# EAGLE board A10S-OLinuXino-MICRO_Rev_A (EAGLE 4.16), part 1 of 2
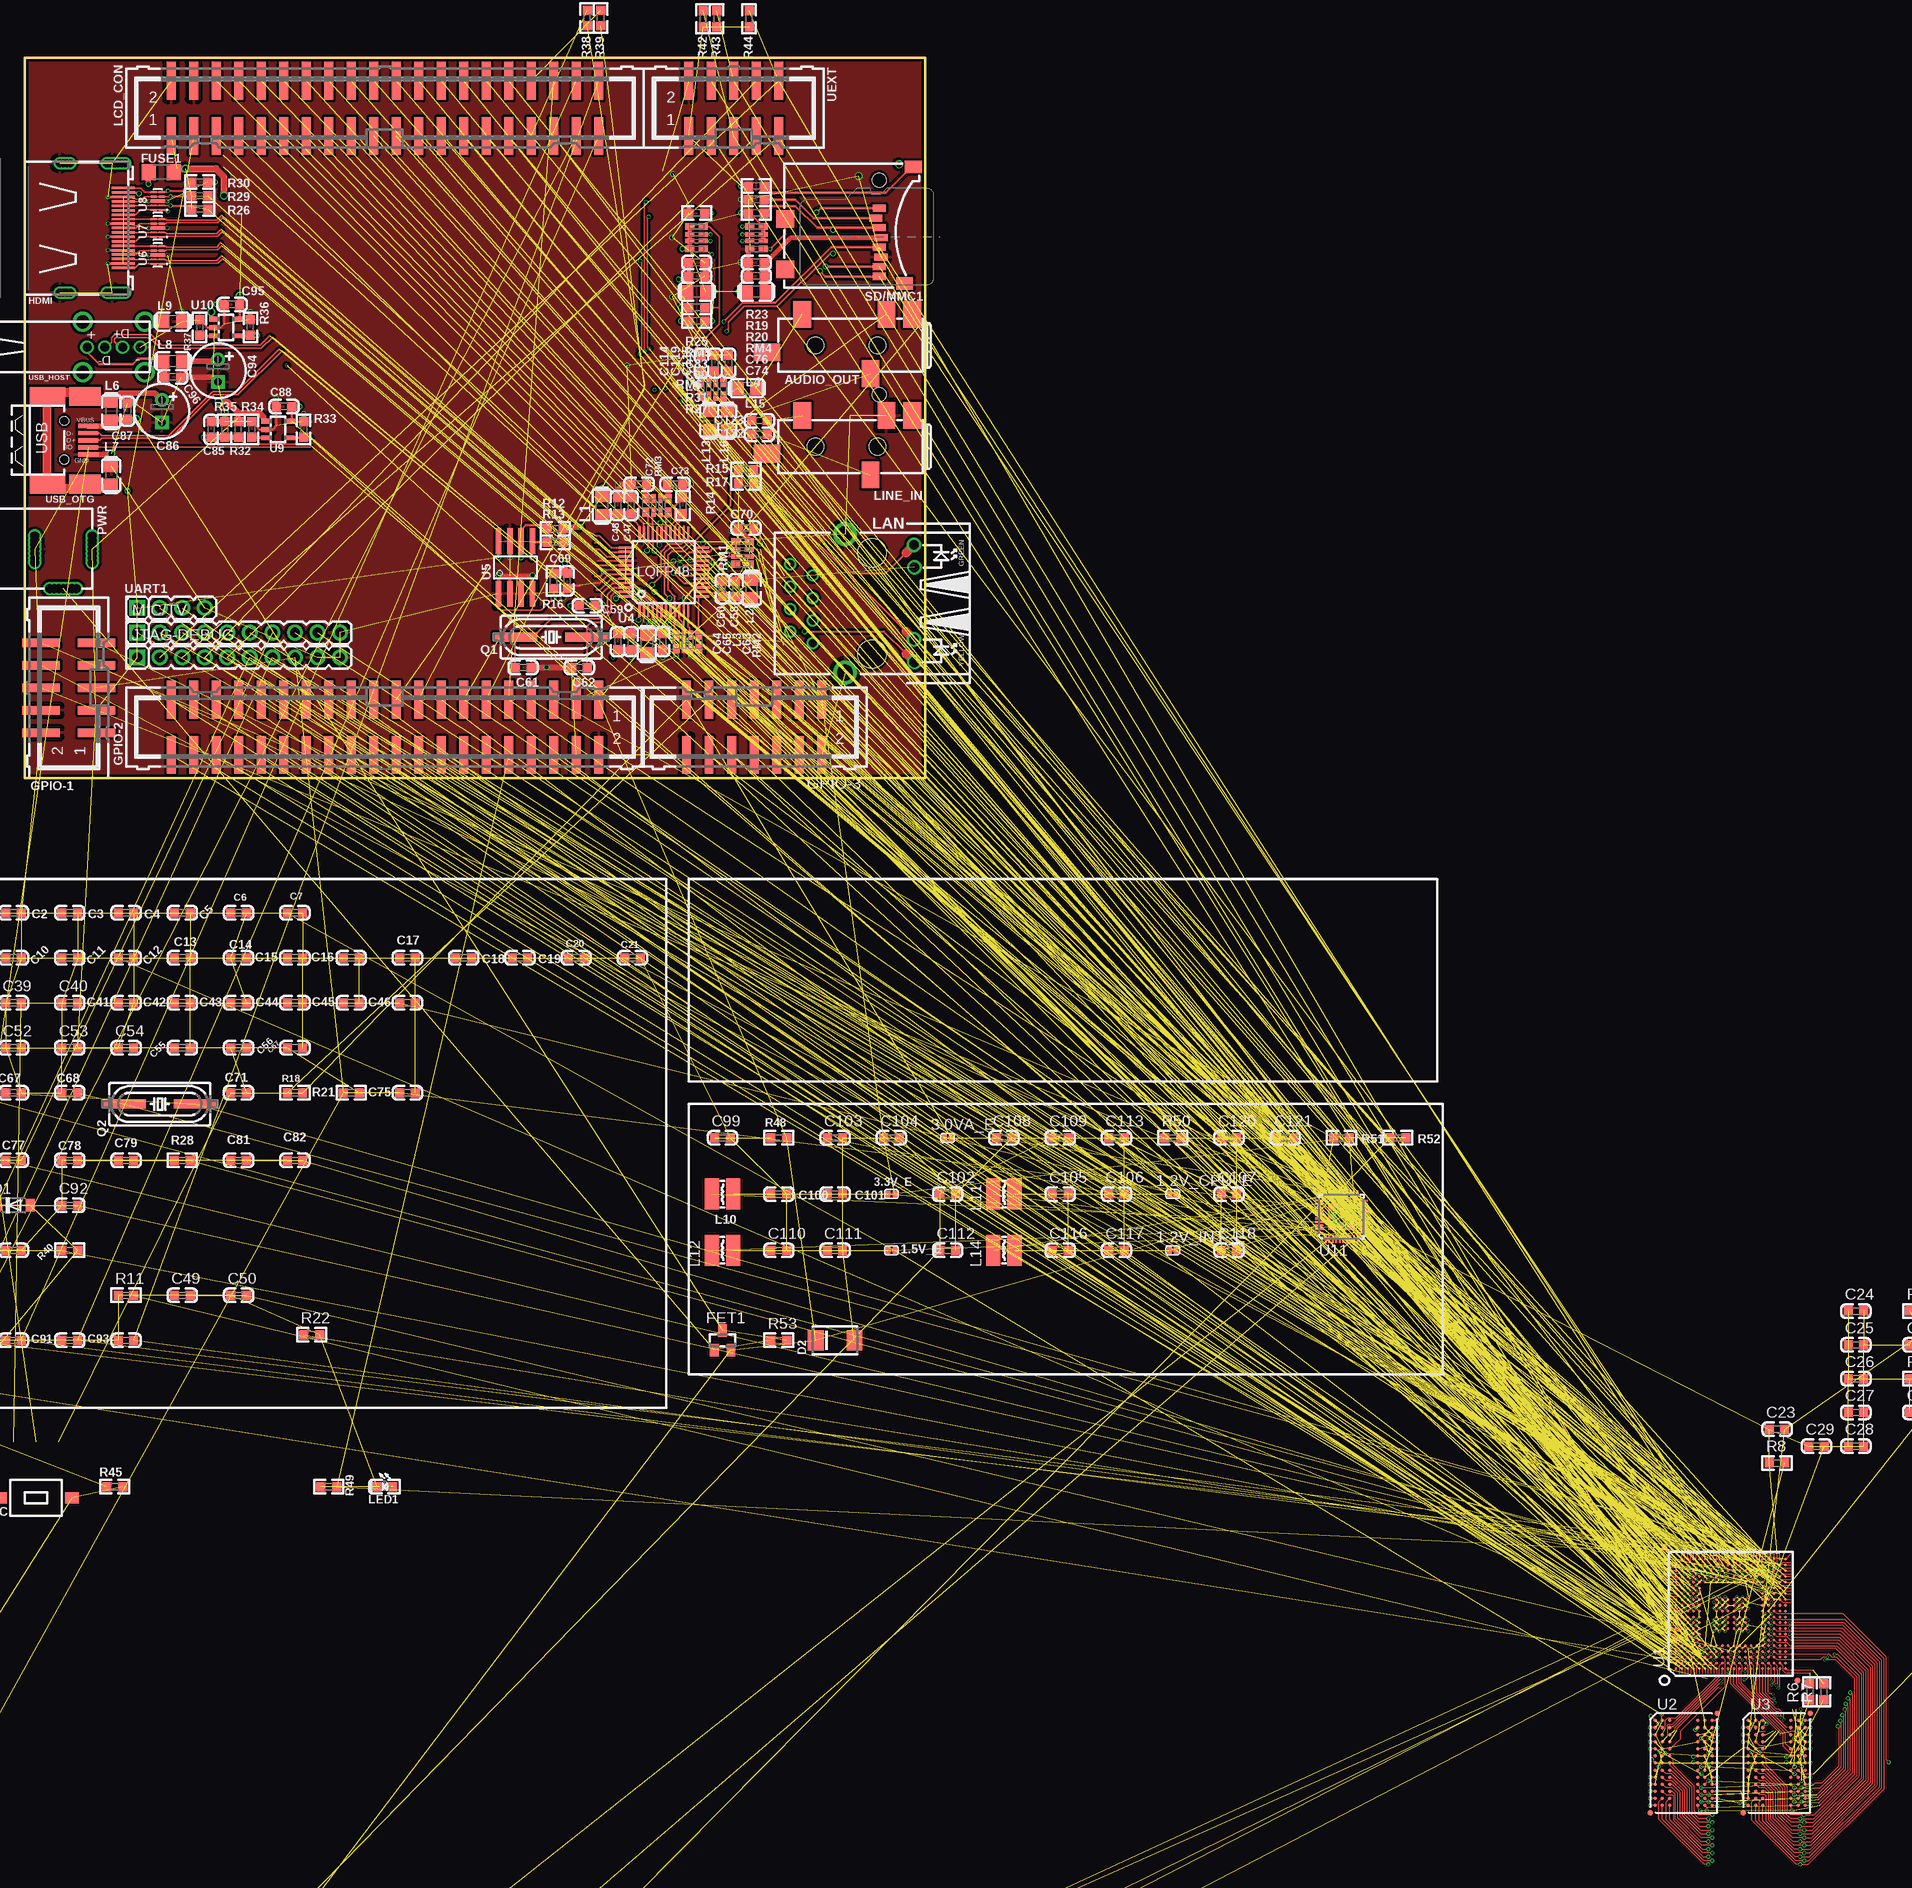
[diagram p0: board, top side]
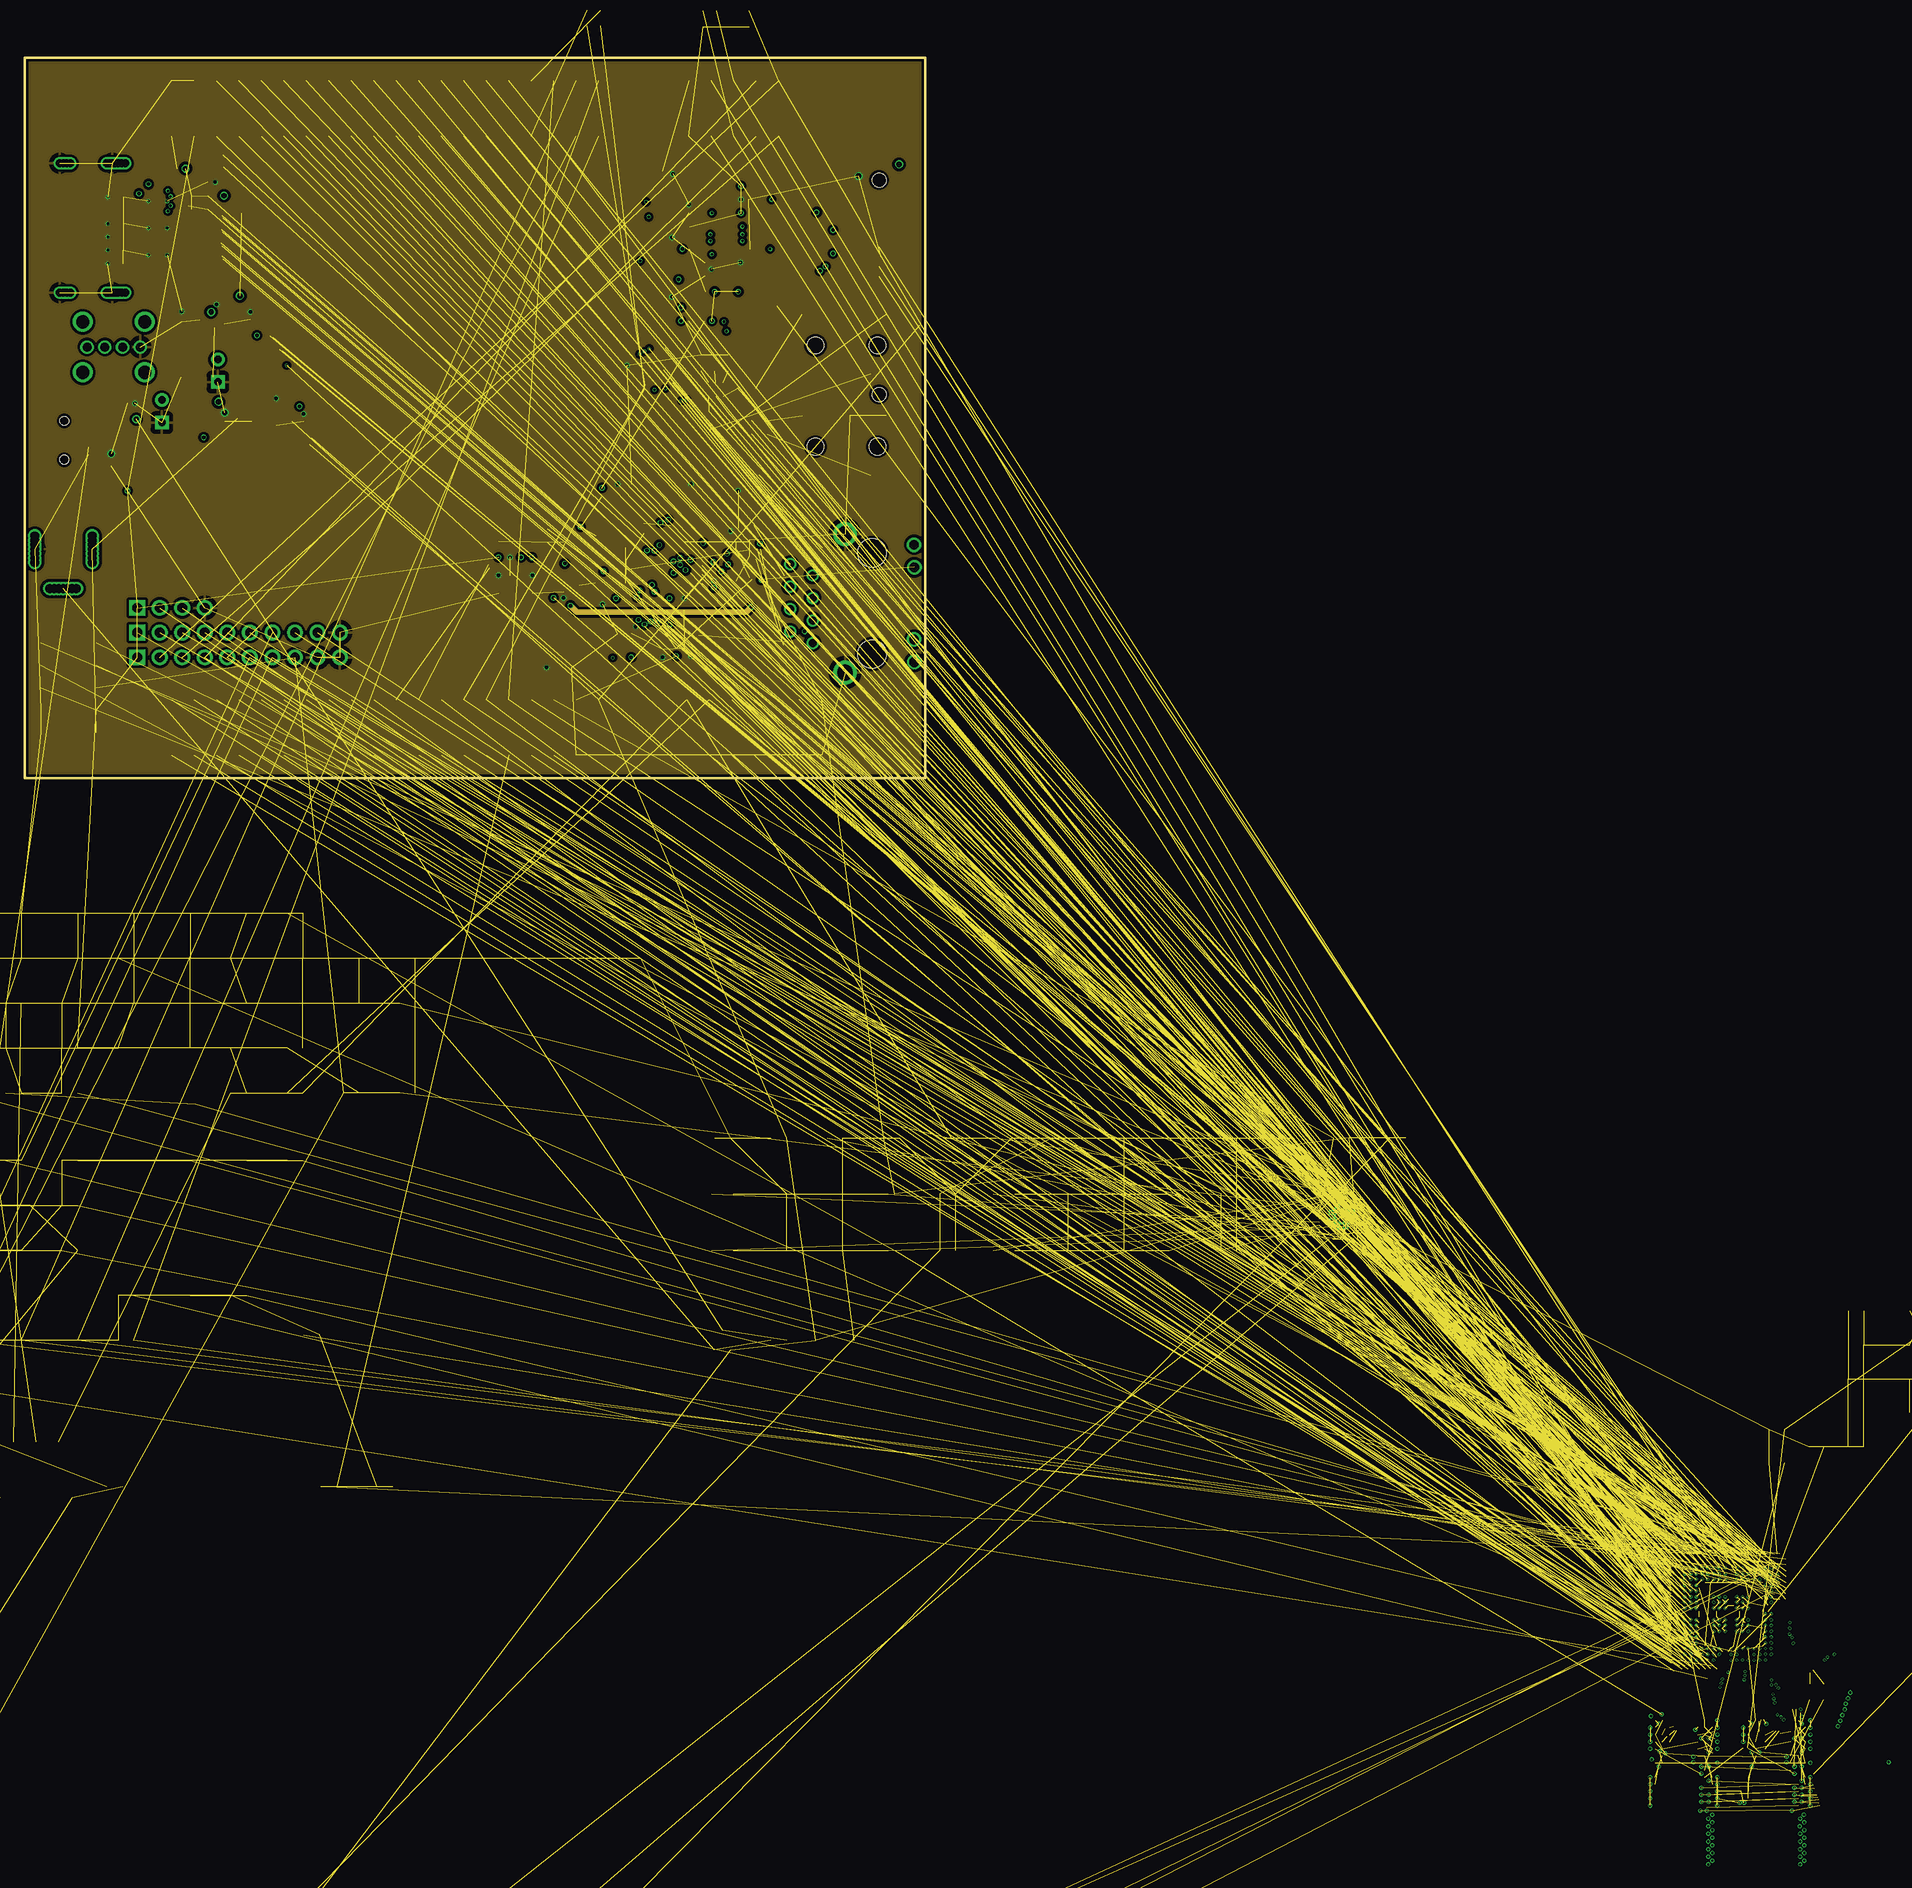
[diagram p1: board, inner layer Route2]
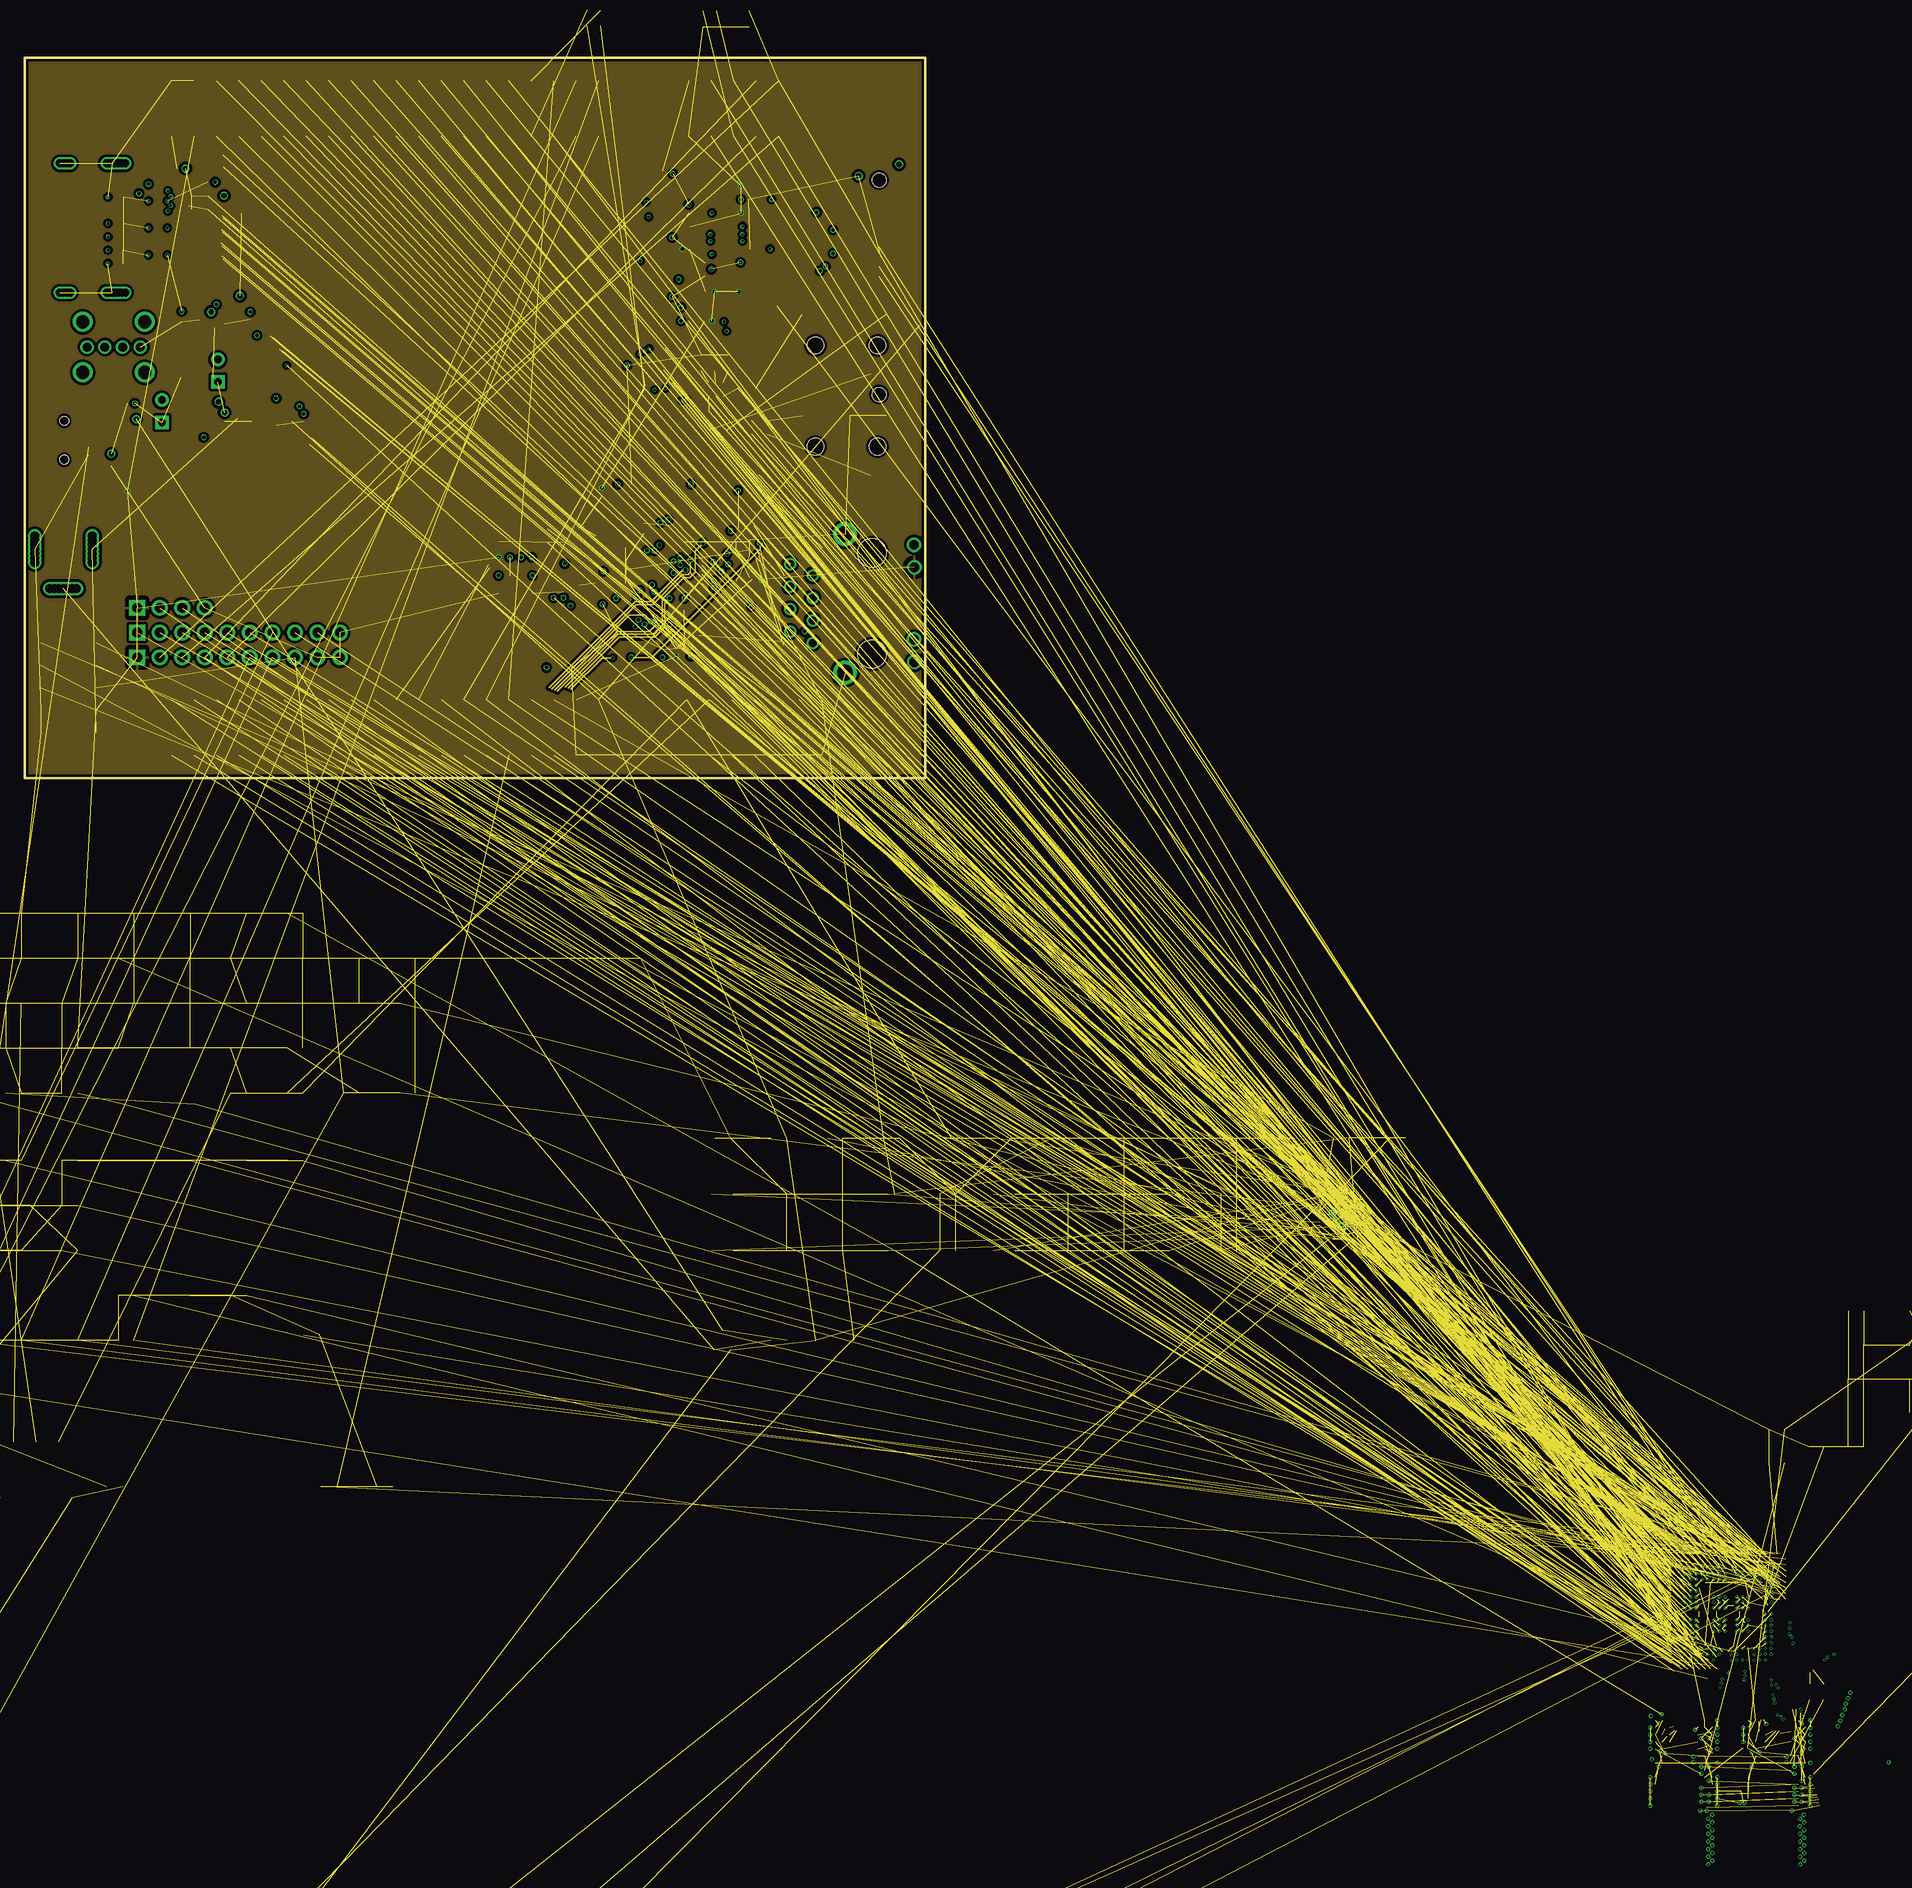
[diagram p2: board, inner layer Route15]
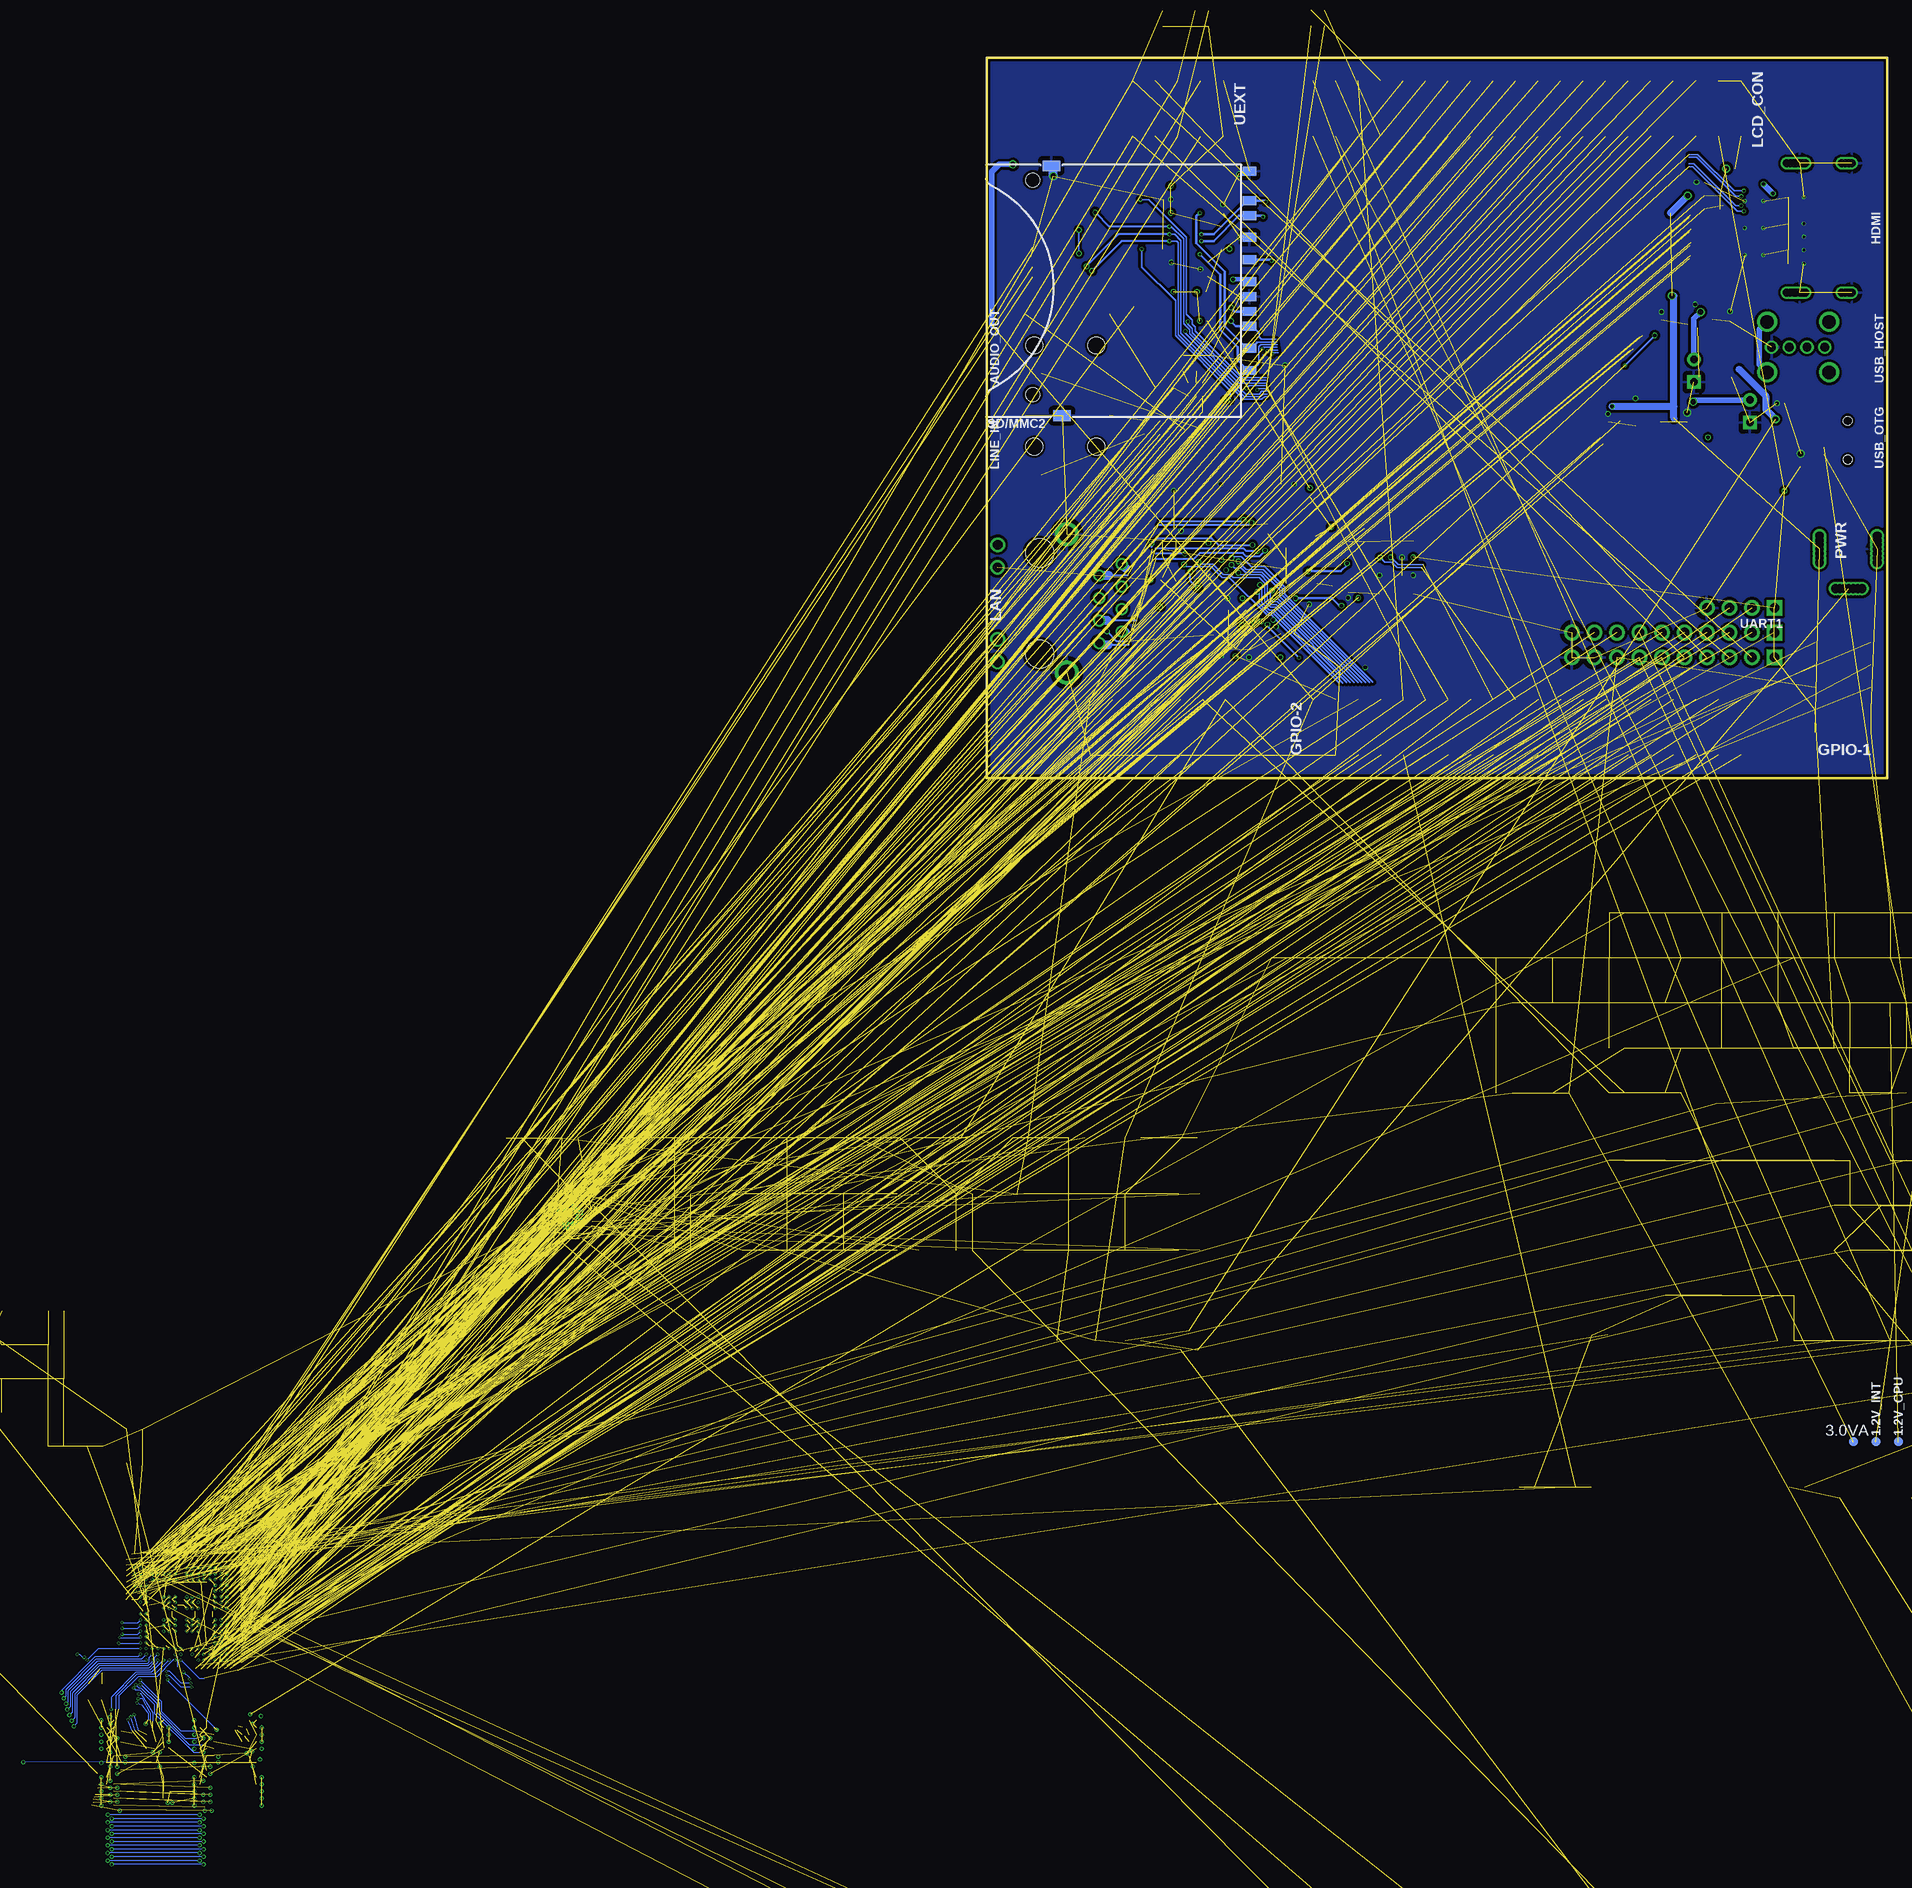
[diagram p3: board, bottom side, seen from below]

Size 101.6 x 81.28 mm. Coordinates in mm from the lower left corner, seen from the top.
Outline: 0,0 101.6,0 101.6,81.28 0,81.28 0,0
Copper layers (1*2*15*16): Top 0.018mm / dielectric 0.12mm / Route2 0.035mm / dielectric 1.2mm / Route15 0.035mm / dielectric 0.12mm / Bottom 0.018mm
Design rules "default": minimum track width 4mil, minimum drill 0.2mm, track to track 5mil, track to pad 5mil, pad to pad 5mil, via to via 5mil, smd to smd 1mil, copper to edge 10mil, drill to drill 8mil, minimum pad ring 6mil, minimum via ring 2.5mil, stop-mask expansion 4mil, vias tented up to drill 25mil, thermal gap 20mil
Net classes: 1 PWR: width 0.127 mm, drill 0.076 mm, clearance 0.254 mm

## Footprints (pad centres in the part's own frame; a part is rotated, then mirrored left to right if it is on the bottom)
TESTPAD_40-ROUND = smd 1.016 x 1.016: 1 0,0
SJ_1_SMALLER_CLOSE = smd 0.508 x 0.762: 1 -0.381,0; 2 0.381,0
SJ_2_SMALL_12_TIED = smd 0.762 x 1.016: 1 -1.143,0; 2 0,0; 3 1.143,0
PJ-W47S-05D2-LF_5PIN_V2 = smd 2 x 3: 1 2.1,-0.5; 2 14.5,-0.5; 3 6.8,6.2; 5 5,-0.5 | smd 3 x 2: 4 18.5,3.8 | hole 1.9: 6,3; 13,3
SW-TAKT_6X3.5_SMD = smd 1.27 x 1.524: P$1 0,4.064; P$2 0,-4.064
C0603_DWS = smd 1.016 x 1.016: 1 -0.889,0; 2 0.889,0
E2,5-6,3 = drill 0.864 pad 1.524 round: + -1.27,0 | drill 0.864 pad 1.524 square: - 1.27,0
SOD-123 = smd 1 x 1.4: A 1.9,0; C -1.9,0
DO214AA = smd 1.778 x 2.286: A 2.177,0; C -2.177,0
SOT23 = smd 1 x 1.4: 1 -0.95,-1.1; 2 0.95,-1.1; 3 0,1.1
1206 = smd 1.6 x 1.8: 1 -1.4,0; 2 1.4,0
ML10_S = smd 1 x 4.25: 1 -5.08,-3.125; 2 -5.08,3.125; 3 -2.54,-3.125; 4 -2.54,3.125; 5 0,-3.125; 6 0,3.125; 7 2.54,-3.125; 8 2.54,3.125; 9 5.08,-3.125; 10 5.08,3.125
ML40-MALE(GBH-254-SMT-40) = smd 1 x 4.25: 1 -24.13,-3.125; 2 -24.13,3.125; 3 -21.59,-3.125; 4 -21.59,3.125; 5 -19.05,-3.125; 6 -19.05,3.125; 7 -16.51,-3.125; 8 -16.51,3.125; 9 -13.97,-3.125; 10 -13.97,3.125; 11 -11.43,-3.125; 12 -11.43,3.125; 13 -8.89,-3.125; 14 -8.89,3.125; 15 -6.35,-3.125; 16 -6.35,3.125; 17 -3.81,-3.125; 18 -3.81,3.125; 19 -1.27,-3.125; 20 -1.27,3.125; 21 1.27,-3.125; 22 1.27,3.125; 23 3.81,-3.125; 24 3.81,3.125; 25 6.35,-3.125; 26 6.35,3.125; 27 8.89,-3.125; 28 8.89,3.125; 29 11.43,-3.125; 30 11.43,3.125; 31 13.97,-3.125; 32 13.97,3.125; 33 16.51,-3.125; 34 16.51,3.125; 35 19.05,-3.125; 36 19.05,3.125; 37 21.59,-3.125; 38 21.59,3.125; 39 24.13,-3.125; 40 24.13,3.125
ML14_S = smd 1 x 4.25: 1 -7.62,-3.125; 2 -7.62,3.125; 3 -5.08,-3.125; 4 -5.08,3.125; 5 -2.54,-3.125; 6 -2.54,3.125; 7 0,-3.125; 8 0,3.125; 9 2.54,-3.125; 10 2.54,3.125; 11 5.08,-3.125; 12 5.08,3.125; 13 7.62,-3.125; 14 7.62,3.125
HDMI-SWM-19 = smd 2.6 x 0.28: 1 1.3,4.5; 2 1.3,4; 3 1.3,3.5; 4 1.3,3; 5 1.3,2.5; 6 1.3,2; 7 1.3,1.5; 8 1.3,1; 9 1.3,0.5; 10 1.3,0; 11 1.3,-0.5; 12 1.3,-1; 13 1.3,-1.5; 14 1.3,-2; 15 1.3,-2.5; 16 1.3,-3; 17 1.3,-3.5; 18 1.3,-4; 19 1.3,-4.5 | drill 0.9 round: P$5 1.5,7.3; P$7 7.7,7.3; P$9 7.7,-7.3; P$11 1.5,-7.3; P$13 1.9,7.3; P$14 3.2,7.3; P$15 8.1,7.3; P$18 8.1,-7.3; P$19 3.2,-7.3; P$20 1.9,-7.3; P$21 2.2,7.3; P$22 2.9,7.3; P$23 2.9,-7.3; P$24 2.2,-7.3; P$25 1.1,7.3; P$26 1.1,-7.3; P$27 7.3,-7.3; P$28 7.3,7.3; SH1 2.55,7.3; SH2 8.45,7.3; SH3 8.45,-7.3; SH4 2.55,-7.3
SJ_1_SMALLER = smd 0.508 x 0.762: 1 -0.381,0; 2 0.381,0
HN1X10 = drill 1.1 pad 1.778 square: 1 -11.43,0 | drill 1.1 pad 1.778 round: 2 -8.89,0; 3 -6.35,0; 4 -3.81,0; 5 -1.27,0; 6 1.27,0; 7 3.81,0; 8 6.35,0; 9 8.89,0; 10 11.43,0
L0805_5MIL_DWS = smd 1.27 x 1.524: 1 -1.016,0; 2 1.016,0
CD32 = smd 3.5 x 1.6: 1 0,1.2; 2 0,-1.2
RJLBC-060TC1 = drill 0.9 round: 1 -4.455,6.7; 2 -3.185,9.24; 3 -1.915,6.7; 4 -0.645,9.24; 5 0.625,6.7; 6 1.895,9.24; 7 3.165,6.7; 8 4.435,9.24 | drill 1.1 round: AG 4.07,-4.773; AY -6.61,-4.773; KG 6.61,-4.748; KY -4.07,-4.748 | drill 1.8 round: GND1 -7.8,3.05; GND2 7.8,3.05 | hole 3.2: -5.715,0; 5.715,0
LED-0603 = smd 1.016 x 1.016: A 0.889,0; C -0.889,0
PWR_JACK_UNI_MILLING = drill 1 round: + 0,4.75; +1 0,5.25; +2 0,5.75; +3 0,6.25; +4 0,4.25; +5 0,3.75; +6 0,3.25; - -6.5,4.75; -1 -6.5,5.25; -2 -6.5,5.75; -3 -6.5,4.25; -4 -6.5,3.75; -5 -6.5,6.25; -6 -6.5,3.25; -- -3.3,0.3; --1 -3.8,0.3; --2 -4.3,0.3; --3 -4.8,0.3; --4 -2.8,0.3; --5 -2.3,0.3; --6 -1.8,0.3
HC49/SMD2_THIN = smd 5 x 1: 1 -4.064,0; 2 4.064,0
R0603_5MIL_DWS = smd 1.016 x 1.016: 1 -0.889,0; 2 0.889,0
0603_0R = smd 1.016 x 1.016: 1 -0.889,0; 2 0.889,0
R_MATRIX_4 = smd 1.016 x 0.762: 1.1 -0.762,1.27; 1.2 0.762,1.27; 4.1 -0.762,-1.27; 4.2 0.762,-1.27 | smd 1.016 x 0.508: 2.1 -0.762,0.381; 2.2 0.762,0.381; 3.1 -0.762,-0.381; 3.2 0.762,-0.381
TFR-MEM-CON = smd 0.8 x 1.5: 1 -3.2,10.7; 2 -2.1,10.3; 3 -1,10.7; 4 0.1,10.9; 5 1.2,10.7; 6 2.3,10.9; 7 3.4,10.7; 8 4.5,10.7 | smd 2 x 2: 9 3.7,0.1; 10 -2,0.1 | smd 1.4 x 1.9: 11 5.3,13.55; 12 -7.85,14.55
SD_CARD = smd 1 x 1.5: 1 6.88,15.3; 2 4.38,15.3; 3 1.08,15.3; 4 -0.63,15.3; 5 -3.13,15.3; 6 -5.63,15.3; 7 -8.06,15.3; 8 -9.76,15.3; 9 9.38,15.3; CD 2.73,15.3; WP -13.11,15.3 | smd 1.2 x 2: SH1 -13.7,-7.05; SH2 14.5,-5.85 | hole 1.6: -12.09,-9.15; 12.1,-9.15
SOT-23 = smd 1 x 1.4: 1 -0.95,-1.1; 2 0.95,-1.1; 3 0,1.1
TFBGA336 = smd 0.32 x 0.32: A1 -6.175,6.175; A2 -5.525,6.175; A3 -4.875,6.175; A4 -4.225,6.175; A5 -3.575,6.175; A6 -2.925,6.175; A7 -2.275,6.175; A8 -1.625,6.175; A9 -0.975,6.175; A10 -0.325,6.175; A11 0.325,6.175; A12 0.975,6.175; A13 1.625,6.175; A14 2.275,6.175; A15 2.925,6.175; A16 3.575,6.175; A17 4.225,6.175; A18 4.875,6.175; A19 5.525,6.175; A20 6.175,6.175; B1 -6.175,5.525; B2 -5.525,5.525; B3 -4.875,5.525; B4 -4.225,5.525; B5 -3.575,5.525; B6 -2.925,5.525; B7 -2.275,5.525; B8 -1.625,5.525; B9 -0.975,5.525; B10 -0.325,5.525; B11 0.325,5.525; B12 0.975,5.525; B13 1.625,5.525; B14 2.275,5.525; B15 2.925,5.525; B16 3.575,5.525; B17 4.225,5.525; B18 4.875,5.525; B19 5.525,5.525; B20 6.175,5.525; C1 -6.175,4.875; C2 -5.525,4.875; C3 -4.875,4.875; C4 -4.225,4.875; C5 -3.575,4.875; C6 -2.925,4.875; C7 -2.275,4.875; C8 -1.625,4.875; C9 -0.975,4.875; C10 -0.325,4.875; C11 0.325,4.875; C12 0.975,4.875; C13 1.625,4.875; C14 2.275,4.875; C15 2.925,4.875; C16 3.575,4.875; C17 4.225,4.875; C18 4.875,4.875; C19 5.525,4.875; C20 6.175,4.875; D1 -6.175,4.225; D2 -5.525,4.225; D3 -4.875,4.225; D4 -4.225,4.225; D5 -3.575,4.225; D6 -2.925,4.225; D7 -2.275,4.225; D8 -1.625,4.225; D9 -0.975,4.225; D10 -0.325,4.225; D11 0.325,4.225; D12 0.975,4.225; D13 1.625,4.225; D14 2.275,4.225; D15 2.925,4.225; D16 3.575,4.225; D17 4.225,4.225; D18 4.875,4.225; D19 5.525,4.225; D20 6.175,4.225; E1 -6.175,3.575; E2 -5.525,3.575; E3 -4.875,3.575; E4 -4.225,3.575; E5 -3.575,3.575; E6 -2.925,3.575; E7 -2.275,3.575; E8 -1.625,3.575; E9 -0.975,3.575; E10 -0.325,3.575; E11 0.325,3.575; E12 0.975,3.575; E13 1.625,3.575; E14 2.275,3.575; E15 2.925,3.575; E16 3.575,3.575; E17 4.225,3.575; E18 4.875,3.575; E19 5.525,3.575; E20 6.175,3.575; F1 -6.175,2.925; F2 -5.525,2.925; F3 -4.875,2.925; F4 -4.225,2.925; F5 -3.575,2.925; F16 3.575,2.925; F17 4.225,2.925; F18 4.875,2.925; F19 5.525,2.925; F20 6.175,2.925; G1 -6.175,2.275; G2 -5.525,2.275; G3 -4.875,2.275; G4 -4.225,2.275; G5 -3.575,2.275; G16 3.575,2.275; G17 4.225,2.275; G18 4.875,2.275; G19 5.525,2.275; G20 6.175,2.275; H1 -6.175,1.625; H2 -5.525,1.625; H3 -4.875,1.625; H4 -4.225,1.625; H5 -3.575,1.625; H8 -1.625,1.625; H9 -0.975,1.625; H10 -0.325,1.625; H11 0.325,1.625; H12 0.975,1.625; H13 1.625,1.625; H16 3.575,1.625; H17 4.225,1.625; H18 4.875,1.625; H19 5.525,1.625; H20 6.175,1.625; J1 -6.175,0.975; J2 -5.525,0.975; J3 -4.875,0.975; J4 -4.225,0.975; J5 -3.575,0.975; J8 -1.625,0.975; J9 -0.975,0.975; J10 -0.325,0.975; J11 0.325,0.975; J12 0.975,0.975; J13 1.625,0.975; J16 3.575,0.975; J17 4.225,0.975; J18 4.875,0.975; J19 5.525,0.975; J20 6.175,0.975; K1 -6.175,0.325; K2 -5.525,0.325; K3 -4.875,0.325; K4 -4.225,0.325; K5 -3.575,0.325; K8 -1.625,0.325; K9 -0.975,0.325; K10 -0.325,0.325; K11 0.325,0.325; K12 0.975,0.325; K13 1.625,0.325; K16 3.575,0.325; K17 4.225,0.325; K18 4.875,0.325; K19 5.525,0.325; K20 6.175,0.325; L1 -6.175,-0.325; L2 -5.525,-0.325; L3 -4.875,-0.325; L4 -4.225,-0.325; L5 -3.575,-0.325; L8 -1.625,-0.325; L9 -0.975,-0.325; L10 -0.325,-0.325; L11 0.325,-0.325; L12 0.975,-0.325; L13 1.625,-0.325; L16 3.575,-0.325; L17 4.225,-0.325; L18 4.875,-0.325; L19 5.525,-0.325; L20 6.175,-0.325; M1 -6.175,-0.975; M2 -5.525,-0.975; M3 -4.875,-0.975; M4 -4.225,-0.975; M5 -3.575,-0.975; M8 -1.625,-0.975; M9 -0.975,-0.975; M10 -0.325,-0.975; M11 0.325,-0.975; M12 0.975,-0.975; M13 1.625,-0.975; M16 3.575,-0.975; M17 4.225,-0.975; M18 4.875,-0.975; M19 5.525,-0.975; M20 6.175,-0.975; N1 -6.175,-1.625; N2 -5.525,-1.625; N3 -4.875,-1.625; N4 -4.225,-1.625; N5 -3.575,-1.625; N8 -1.625,-1.625; N9 -0.975,-1.625; N10 -0.325,-1.625; N11 0.325,-1.625; N12 0.975,-1.625; N13 1.625,-1.625; N16 3.575,-1.625; N17 4.225,-1.625; N18 4.875,-1.625; N19 5.525,-1.625; N20 6.175,-1.625; P1 -6.175,-2.275; P2 -5.525,-2.275; P3 -4.875,-2.275; P4 -4.225,-2.275; P5 -3.575,-2.275; P16 3.575,-2.275; P17 4.225,-2.275; P18 4.875,-2.275; P19 5.525,-2.275; P20 6.175,-2.275; R1 -6.175,-2.925; R2 -5.525,-2.925; R3 -4.875,-2.925; R4 -4.225,-2.925; R5 -3.575,-2.925; R16 3.575,-2.925; R17 4.225,-2.925; R18 4.875,-2.925; R19 5.525,-2.925; R20 6.175,-2.925; T1 -6.175,-3.575; T2 -5.525,-3.575; T3 -4.875,-3.575; T4 -4.225,-3.575; T5 -3.575,-3.575; T6 -2.925,-3.575; T7 -2.275,-3.575; T8 -1.625,-3.575; T9 -0.975,-3.575; T10 -0.325,-3.575; T11 0.325,-3.575; T12 0.975,-3.575; T13 1.625,-3.575; T14 2.275,-3.575; T15 2.925,-3.575; T16 3.575,-3.575; T17 4.225,-3.575; T18 4.875,-3.575; T19 5.525,-3.575; T20 6.175,-3.575; U1 -6.175,-4.225; U2 -5.525,-4.225; U3 -4.875,-4.225; U4 -4.225,-4.225; U5 -3.575,-4.225; U6 -2.925,-4.225; U7 -2.275,-4.225; U8 -1.625,-4.225; U9 -0.975,-4.225; U10 -0.325,-4.225; U11 0.325,-4.225; U12 0.975,-4.225; U13 1.625,-4.225; U14 2.275,-4.225; U15 2.925,-4.225; U16 3.575,-4.225; U17 4.225,-4.225; U18 4.875,-4.225; U19 5.525,-4.225; U20 6.175,-4.225; V1 -6.175,-4.875; V2 -5.525,-4.875; V3 -4.875,-4.875; V4 -4.225,-4.875; V5 -3.575,-4.875; V6 -2.925,-4.875; V7 -2.275,-4.875; V8 -1.625,-4.875; V9 -0.975,-4.875; V10 -0.325,-4.875; V11 0.325,-4.875; V12 0.975,-4.875; V13 1.625,-4.875; V14 2.275,-4.875; V15 2.925,-4.875; V16 3.575,-4.875; V17 4.225,-4.875; V18 4.875,-4.875; V19 5.525,-4.875; V20 6.175,-4.875; W1 -6.175,-5.525; W2 -5.525,-5.525; W3 -4.875,-5.525; W4 -4.225,-5.525; W5 -3.575,-5.525; W6 -2.925,-5.525; W7 -2.275,-5.525; W8 -1.625,-5.525; W9 -0.975,-5.525; W10 -0.325,-5.525; W11 0.325,-5.525; W12 0.975,-5.525; W13 1.625,-5.525; W14 2.275,-5.525; W15 2.925,-5.525; W16 3.575,-5.525; W17 4.225,-5.525; W18 4.875,-5.525; W19 5.525,-5.525; W20 6.175,-5.525; Y1 -6.175,-6.175; Y2 -5.525,-6.175; Y3 -4.875,-6.175; Y4 -4.225,-6.175; Y5 -3.575,-6.175; Y6 -2.925,-6.175; Y7 -2.275,-6.175; Y8 -1.625,-6.175; Y9 -0.975,-6.175; Y10 -0.325,-6.175; Y11 0.325,-6.175; Y12 0.975,-6.175; Y13 1.625,-6.175; Y14 2.275,-6.175; Y15 2.925,-6.175; Y16 3.575,-6.175; Y17 4.225,-6.175; Y18 4.875,-6.175; Y19 5.525,-6.175; Y20 6.175,-6.175 | smd 0.7 x 0.7: FID1 -7.5,-7.5; FID2 7.5,7.5
FBGA78 = smd 0.4 x 0.4: A1 -3.2,4.8; A2 -2.4,4.8; A3 -1.6,4.8; A7 1.6,4.8; A8 2.4,4.8; A9 3.2,4.8; B1 -3.2,4; B2 -2.4,4; B3 -1.6,4; B7 1.6,4; B8 2.4,4; B9 3.2,4; C1 -3.2,3.2; C2 -2.4,3.2; C3 -1.6,3.2; C7 1.6,3.2; C8 2.4,3.2; C9 3.2,3.2; D1 -3.2,2.4; D2 -2.4,2.4; D3 -1.6,2.4; D7 1.6,2.4; D8 2.4,2.4; D9 3.2,2.4; E1 -3.2,1.6; E2 -2.4,1.6; E3 -1.6,1.6; E7 1.6,1.6; E8 2.4,1.6; E9 3.2,1.6; F1 -3.2,0.8; F2 -2.4,0.8; F3 -1.6,0.8; F7 1.6,0.8; F8 2.4,0.8; F9 3.2,0.8; G1 -3.2,0; G2 -2.4,0; G3 -1.6,0; G7 1.6,0; G8 2.4,0; G9 3.2,0; H1 -3.2,-0.8; H2 -2.4,-0.8; H3 -1.6,-0.8; H7 1.6,-0.8; H8 2.4,-0.8; H9 3.2,-0.8; J1 -3.2,-1.6; J2 -2.4,-1.6; J3 -1.6,-1.6; J7 1.6,-1.6; J8 2.4,-1.6; J9 3.2,-1.6; K1 -3.2,-2.4; K2 -2.4,-2.4; K3 -1.6,-2.4; K7 1.6,-2.4; K8 2.4,-2.4; K9 3.2,-2.4; L1 -3.2,-3.2; L2 -2.4,-3.2; L3 -1.6,-3.2; L7 1.6,-3.2; L8 2.4,-3.2; L9 3.2,-3.2; M1 -3.2,-4; M2 -2.4,-4; M3 -1.6,-4; M7 1.6,-4; M8 2.4,-4; M9 3.2,-4; N1 -3.2,-4.8; N2 -2.4,-4.8; N3 -1.6,-4.8; N7 1.6,-4.8; N8 2.4,-4.8; N9 3.2,-4.8 | smd 0.6 x 0.6: FID1 -3.8,-5.6; FID2 3.8,5.6
LQFP48 = smd 0.254 x 1.6: 1 -2.75,-4.3; 2 -2.25,-4.3; 3 -1.75,-4.3; 4 -1.25,-4.3; 5 -0.75,-4.3; 6 -0.25,-4.3; 7 0.25,-4.3; 8 0.75,-4.3; 9 1.25,-4.3; 10 1.75,-4.3; 11 2.25,-4.3; 12 2.75,-4.3; 25 2.75,4.3; 26 2.25,4.3; 27 1.75,4.3; 28 1.25,4.3; 29 0.75,4.3; 30 0.25,4.3; 31 -0.25,4.3; 32 -0.75,4.3; 33 -1.25,4.3; 34 -1.75,4.3; 35 -2.25,4.3; 36 -2.75,4.3 | smd 1.6 x 0.254: 13 4.3,-2.75; 14 4.3,-2.25; 15 4.3,-1.75; 16 4.3,-1.25; 17 4.3,-0.75; 18 4.3,-0.25; 19 4.3,0.25; 20 4.3,0.75; 21 4.3,1.25; 22 4.3,1.75; 23 4.3,2.25; 24 4.3,2.75; 37 -4.3,2.75; 38 -4.3,2.25; 39 -4.3,1.75; 40 -4.3,1.25; 41 -4.3,0.75; 42 -4.3,0.25; 43 -4.3,-0.25; 44 -4.3,-0.75; 45 -4.3,-1.25; 46 -4.3,-1.75; 47 -4.3,-2.25; 48 -4.3,-2.75
SO-08MN = smd 0.61 x 2.921: 1 -1.905,-2.981; 2 -0.635,-2.981; 3 0.635,-2.981; 4 1.905,-2.981; 5 1.905,2.981; 6 0.635,2.981; 7 -0.635,2.981; 8 -1.905,2.981
SLP2510P8 = smd 0.2 x 0.675: 1 -1,-0.438; 2 -0.5,-0.438; 4 0.5,-0.438; 5 1,-0.438; 6 1,0.438; 7 0.5,0.438; 9 -0.5,0.438; 10 -1,0.438 | smd 0.4 x 0.775: 3 0,-0.388; 8 0,0.388
SOT23-5 = smd 0.55 x 1.2: 1 -0.95,-1.3; 2 0,-1.3; 3 0.95,-1.3; 4 0.95,1.3; 5 -0.95,1.3
QFN40_5X5 = smd 0.2 x 0.9: 1 -1.8,-2.5; 2 -1.4,-2.5; 3 -1,-2.5; 4 -0.6,-2.5; 5 -0.2,-2.5; 6 0.2,-2.5; 7 0.6,-2.5; 8 1,-2.5; 9 1.4,-2.5; 10 1.8,-2.5; 21 1.8,2.5; 22 1.4,2.5; 23 1,2.5; 24 0.6,2.5; 25 0.2,2.5; 26 -0.2,2.5; 27 -0.6,2.5; 28 -1,2.5; 29 -1.4,2.5; 30 -1.8,2.5 | smd 0.9 x 0.2: 11 2.5,-1.8; 12 2.5,-1.4; 13 2.5,-1; 14 2.5,-0.6; 15 2.5,-0.2; 16 2.5,0.2; 17 2.5,0.6; 18 2.5,1; 19 2.5,1.4; 20 2.5,1.8; 31 -2.5,1.8; 32 -2.5,1.4; 33 -2.5,1; 34 -2.5,0.6; 35 -2.5,0.2; 36 -2.5,-0.2; 37 -2.5,-0.6; 38 -2.5,-1; 39 -2.5,-1.4; 40 -2.5,-1.8 | drill 1.2 pad 1.422 square: N1 0,0 | drill 0.254 pad 0.4 square: N2 -1.15,0.475; N3 -0.75,0.475; N4 -1.15,-0.475; N5 -0.75,-0.475; N6 -0.475,-1.15; N7 -0.475,-0.75; N8 0.475,-1.15; N9 0.475,-0.75; N10 1.15,-0.475; N11 0.75,-0.475; N12 1.15,0.475; N13 0.75,0.475; N14 0.475,1.15; N15 0.475,0.75; N16 -0.475,1.15; N17 -0.475,0.75 | smd 3 x 3: VSS 0,0
FIDUCIAL-1X2 = smd 1 x 1: 1 0,0
HN1X4 = drill 1.1 pad 1.778 square: 1 -3.81,0 | drill 1.1 pad 1.778 round: 2 -1.27,0; 3 1.27,0; 4 3.81,0
JP2 = drill 1.1 pad 1.778 square: 1 -2.54,0 | drill 1.1 pad 1.778 round: 2 0,0; 3 2.54,0
USB_A_VERTICAL_PTH = drill 1 round: 1 3.45,12.75; 2 3.45,14.75; 3 3.45,16.75; 4 3.45,18.75 | drill 1.5 round: P$1 0.6,12.25; P$2 6.3,12.25; P$3 6.3,19.25; P$4 0.6,19.25
USB_MINI_9PIN = smd 2.25 x 0.5: D+ 2.706,0; D- 2.706,0.8; GND 2.706,-1.6; ID 2.706,-0.8; VBUS 2.706,1.6 | smd 4 x 2.1: GND1 -1.9,4.95; GND3 -1.9,-4.95 | smd 3.5 x 2.1: GND2 2.35,4.95; GND4 2.35,-4.95 | hole 1: 0,2.2; 0,-2.2

## Placement (x,y rotation side)
1.2V_CPU  TESTPADTESTPAD_40-ROUND  [TESTPAD_40-ROUND]  -1.27,-74.93 0 bottom  (outside the outline)
1.2V_CPU_E  Close  [SJ_1_SMALLER_CLOSE]  129.54,-46.99 0 top  (outside the outline)
1.2V_INT  TESTPADTESTPAD_40-ROUND  [TESTPAD_40-ROUND]  1.27,-74.93 0 bottom  (outside the outline)
1.2V_INT_E  Close  [SJ_1_SMALLER_CLOSE]  129.54,-53.34 0 top  (outside the outline)
1.5V  TESTPADTESTPAD_40-ROUND  [TESTPAD_40-ROUND]  -6.35,-74.93 0 bottom  (outside the outline)
1.5V_E  Close  [SJ_1_SMALLER_CLOSE]  97.79,-53.34 0 top  (outside the outline)
3.0VA  TESTPADTESTPAD_40-ROUND  [TESTPAD_40-ROUND]  3.81,-74.93 0 bottom  (outside the outline)
3.0VA_E  Close  [SJ_1_SMALLER_CLOSE]  104.14,-40.64 0 top  (outside the outline)
3.3V  TESTPADTESTPAD_40-ROUND  [TESTPAD_40-ROUND]  -3.81,-74.93 0 bottom  (outside the outline)
3.3V_E  Close  [SJ_1_SMALLER_CLOSE]  97.79,-46.99 0 top  (outside the outline)
5V/LDO0  5V:Open/LDO0:Close  [SJ_2_SMALL_12_TIED]  -93.98,-292.1 0 top  (outside the outline)
AUDIO_OUT  PJ-W47S-05D2-LF_V2  [PJ-W47S-05D2-LF_5PIN_V2]  102.23,51.82 180 top
BOOT/REC  T1107A(6x3.8x2.5mm)  [SW-TAKT_6X3.5_SMD]  1.27,-81.28 90 top  (outside the outline)
C1  220nF  [C0603_DWS]  -7.62,-15.24 180 top  (outside the outline)
C2  220nF  [C0603_DWS]  -1.27,-15.24 180 top  (outside the outline)
C3  220nF  [C0603_DWS]  5.08,-15.24 180 top  (outside the outline)
C4  220nF  [C0603_DWS]  11.43,-15.24 180 top  (outside the outline)
C5  220nF  [C0603_DWS]  17.78,-15.24 180 top  (outside the outline)
C6  220nF  [C0603_DWS]  24.13,-15.24 180 top  (outside the outline)
C7  220nF  [C0603_DWS]  30.48,-15.24 180 top  (outside the outline)
C8  220nF  [C0603_DWS]  213.61,-64.01 0 top  (outside the outline)
C9  220nF  [C0603_DWS]  213.61,-71.63 0 top  (outside the outline)
C10  22uF/6.3V  [C0603_DWS]  -1.27,-20.32 180 top  (outside the outline)
C11  220nF  [C0603_DWS]  5.08,-20.32 180 top  (outside the outline)
C12  220nF  [C0603_DWS]  11.43,-20.32 180 top  (outside the outline)
C13  220nF  [C0603_DWS]  17.78,-20.32 180 top  (outside the outline)
C14  220nF  [C0603_DWS]  24.13,-20.32 0 top  (outside the outline)
C15  220nF  [C0603_DWS]  30.48,-20.32 180 top  (outside the outline)
C16  220nF  [C0603_DWS]  36.83,-20.32 180 top  (outside the outline)
C17  220nF  [C0603_DWS]  43.18,-20.32 180 top  (outside the outline)
C18  220nF  [C0603_DWS]  49.53,-20.32 180 top  (outside the outline)
C19  220nF  [C0603_DWS]  55.88,-20.32 180 top  (outside the outline)
C20  220nF  [C0603_DWS]  62.23,-20.32 180 top  (outside the outline)
C21  220nF  [C0603_DWS]  68.58,-20.32 180 top  (outside the outline)
C22  220nF  [C0603_DWS]  223.77,-64.01 0 top  (outside the outline)
C23  220nF  [C0603_DWS]  197.74,-73.53 0 top  (outside the outline)
C24  220nF  [C0603_DWS]  206.63,-60.2 0 top  (outside the outline)
C25  220nF  [C0603_DWS]  206.63,-64.01 0 top  (outside the outline)
C26  220nF  [C0603_DWS]  206.63,-67.82 0 top  (outside the outline)
C27  220nF  [C0603_DWS]  206.63,-71.63 0 top  (outside the outline)
C28  220nF  [C0603_DWS]  206.63,-75.44 0 top  (outside the outline)
C29  220nF  [C0603_DWS]  202.18,-75.44 0 top  (outside the outline)
C30  220nF  [C0603_DWS]  223.77,-71.63 0 top  (outside the outline)
C31  220nF  [C0603_DWS]  235.2,-73.53 0 top  (outside the outline)
C32  220nF  [C0603_DWS]  244.73,-60.2 0 top  (outside the outline)
C33  220nF  [C0603_DWS]  244.73,-64.01 0 top  (outside the outline)
C34  220nF  [C0603_DWS]  244.73,-67.82 0 top  (outside the outline)
C35  220nF  [C0603_DWS]  244.73,-71.63 0 top  (outside the outline)
C36  220nF  [C0603_DWS]  244.73,-75.44 0 top  (outside the outline)
C37  220nF  [C0603_DWS]  240.28,-75.44 0 top  (outside the outline)
C38  220nF  [C0603_DWS]  -7.62,-25.4 0 top  (outside the outline)
C39  220nF  [C0603_DWS]  -1.27,-25.4 0 top  (outside the outline)
C40  220nF  [C0603_DWS]  5.08,-25.4 0 top  (outside the outline)
C41  220nF  [C0603_DWS]  11.43,-25.4 180 top  (outside the outline)
C42  220nF  [C0603_DWS]  17.78,-25.4 180 top  (outside the outline)
C43  220nF  [C0603_DWS]  24.13,-25.4 180 top  (outside the outline)
C44  220nF  [C0603_DWS]  30.48,-25.4 180 top  (outside the outline)
C45  220nF  [C0603_DWS]  36.83,-25.4 180 top  (outside the outline)
C46  220nF  [C0603_DWS]  43.18,-25.4 180 top  (outside the outline)
C47  100nF  [C0603_DWS]  68.43,30.73 270 top
C48  22uF/6.3V  [C0603_DWS]  66.9,30.73 270 top
C49  100nF  [C0603_DWS]  17.78,-58.42 0 top  (outside the outline)
C50  100nF  [C0603_DWS]  24.13,-58.42 0 top  (outside the outline)
C51  220nF  [C0603_DWS]  -7.62,-30.48 0 top  (outside the outline)
C52  220nF  [C0603_DWS]  -1.27,-30.48 0 top  (outside the outline)
C53  220nF  [C0603_DWS]  5.08,-30.48 0 top  (outside the outline)
C54  220nF  [C0603_DWS]  11.43,-30.48 0 top  (outside the outline)
C55  220nF  [C0603_DWS]  17.78,-30.48 180 top  (outside the outline)
C56  220nF  [C0603_DWS]  24.13,-30.48 0 top  (outside the outline)
C57  220nF  [C0603_DWS]  30.48,-30.48 180 top  (outside the outline)
C58  100nF  [C0603_DWS]  80.24,21.34 270 top
C59  100nF  [C0603_DWS]  63.47,19.43 180 top
C60  22uF/6.3V  [C0603_DWS]  78.71,21.34 270 top
C61  33pF  [C0603_DWS]  56.24,12.45 180 top
C62  33pF  [C0603_DWS]  62.59,12.45 0 top
C63  100nF  [C0603_DWS]  71.98,15.37 270 top
C64  100nF  [C0603_DWS]  66.9,15.37 90 top
C65  22uF/6.3V  [C0603_DWS]  68.43,15.37 90 top
C66  NA  [C0603_DWS]  -7.62,-35.56 0 top  (outside the outline)
C67  33pF  [C0603_DWS]  -1.27,-35.56 180 top  (outside the outline)
C68  33pF  [C0603_DWS]  5.08,-35.56 0 top  (outside the outline)
C69  100nF  [C0603_DWS]  61.19,22.23 90 top
C70  100nF  [C0603_DWS]  81.38,28.19 0 top
C71  22uF/6.3V  [C0603_DWS]  24.13,-35.56 180 top  (outside the outline)
C72  100nF  [C0603_DWS]  69.32,33.15 0 top
C73  100nF  [C0603_DWS]  73.38,33.15 180 top
C74  22uF/6.3V  [C0603_DWS]  82.55,56.64 0 top
C75  NA  [C0603_DWS]  43.18,-35.56 180 top  (outside the outline)
C76  22uF/6.3V  [C0603_DWS]  82.55,58.17 0 top
C77  1uF  [C0603_DWS]  -1.27,-43.18 180 top  (outside the outline)
C78  220nF  [C0603_DWS]  5.08,-43.18 0 top  (outside the outline)
C79  10uF/6.3V  [C0603_DWS]  11.43,-43.18 0 top  (outside the outline)
C80  22uF/6.3V  [C0603_DWS]  75.82,56.64 180 top
C81  10uF/6.3V  [C0603_DWS]  24.13,-43.18 0 top  (outside the outline)
C82  220nF  [C0603_DWS]  30.48,-43.18 0 top  (outside the outline)
C83  22uF/6.3V  [C0603_DWS]  75.82,58.17 180 top
C84  220nF  [C0603_DWS]  -7.62,-48.26 0 top  (outside the outline)
C85  100nF  [C0603_DWS]  21.03,39.32 90 top
C86  100uF/16V/LOWESR/105C/6.3x11mm_RM2.5  [E2,5-6,3]  15.47,41.38 270 top
C87  100nF  [C0603_DWS]  11.58,41.38 90 top
C88  100nF  [C0603_DWS]  29.26,41.91 180 top
C89  1nF  [C0603_DWS]  -7.62,-63.5 0 top  (outside the outline)
C90  1nF  [C0603_DWS]  -1.27,-63.5 0 top  (outside the outline)
C91  1nF  [C0603_DWS]  5.08,-63.5 0 top  (outside the outline)
C92  220nF  [C0603_DWS]  5.08,-48.26 0 top  (outside the outline)
C93  1nF  [C0603_DWS]  11.43,-63.5 0 top  (outside the outline)
C94  100uF/16V/LOWESR/105C/6.3x11mm_RM2.5  [E2,5-6,3]  21.79,45.95 270 top
C95  10uF/6.3V  [C0603_DWS]  23.39,53.42 180 top
C96  100nF  [C0603_DWS]  16.69,45.24 0 top
C97  220nF  [C0603_DWS]  -7.62,-53.34 0 top  (outside the outline)
C98  22uF/6.3V  [C0603_DWS]  -1.27,-53.34 180 top  (outside the outline)
C99  10uF/6.3V  [C0603_DWS]  78.74,-40.64 0 top  (outside the outline)
C100  10uF/6.3V  [C0603_DWS]  85.09,-46.99 0 top  (outside the outline)
C101  1nF  [C0603_DWS]  91.44,-46.99 0 top  (outside the outline)
C102  10uF/6.3V  [C0603_DWS]  104.14,-46.99 0 top  (outside the outline)
C103  NA(10uF/6.3V)  [C0603_DWS]  91.44,-40.64 0 top  (outside the outline)
C104  10uF/6.3V  [C0603_DWS]  97.79,-40.64 0 top  (outside the outline)
C105  10uF/6.3V  [C0603_DWS]  116.84,-46.99 0 top  (outside the outline)
C106  1nF  [C0603_DWS]  123.19,-46.99 0 top  (outside the outline)
C107  10uF/6.3V  [C0603_DWS]  135.89,-46.99 0 top  (outside the outline)
C108  10uF/6.3V  [C0603_DWS]  110.49,-40.64 0 top  (outside the outline)
C109  10uF/6.3V  [C0603_DWS]  116.84,-40.64 0 top  (outside the outline)
C110  10uF/6.3V  [C0603_DWS]  85.09,-53.34 0 top  (outside the outline)
C111  1nF  [C0603_DWS]  91.44,-53.34 0 top  (outside the outline)
C112  10uF/6.3V  [C0603_DWS]  104.14,-53.34 0 top  (outside the outline)
C113  1uF  [C0603_DWS]  123.19,-40.64 0 top  (outside the outline)
C114  100nF  [C0603_DWS]  76.35,46.81 270 top
C115  100nF  [C0603_DWS]  79.4,46.81 270 top
C116  10uF/6.3V  [C0603_DWS]  116.84,-53.34 0 top  (outside the outline)
C117  1nF  [C0603_DWS]  123.19,-53.34 0 top  (outside the outline)
C118  10uF/6.3V  [C0603_DWS]  135.89,-53.34 0 top  (outside the outline)
C119  100nF  [C0603_DWS]  77.88,46.81 270 top
C120  1uF  [C0603_DWS]  135.89,-40.64 0 top  (outside the outline)
C121  1uF  [C0603_DWS]  142.24,-40.64 0 top  (outside the outline)
C122  10uF/6.3V  [C0603_DWS]  82.91,38.79 180 top
C123  10uF/6.3V  [C0603_DWS]  82.91,40.31 180 top
C124  100pF  [C0603_DWS]  -93.98,-250.19 0 top  (outside the outline)
C125  10uF/6.3V  [C0603_DWS]  -93.98,-256.54 0 top  (outside the outline)
C126  NA(10uF/6.3V)  [C0603_DWS]  -93.98,-262.89 0 top  (outside the outline)
D1  1N5819(S4SOD-123)  [SOD-123]  -1.27,-48.26 0 top  (outside the outline)
D2  SMBJ6.0A  [DO214AA]  91.44,-63.5 0 top  (outside the outline)
FET1  IRFML8244TRPbF  [SOT23]  78.74,-63.5 0 top  (outside the outline)
FUSE1  FSMD035  [1206]  15.39,68.38 180 top
GND  TESTPADTESTPAD_40-ROUND  [TESTPAD_40-ROUND]  -8.89,-74.93 0 bottom  (outside the outline)
GPIO-1  BH10S  [ML10_S]  4.95,10.16 90 top
GPIO-2  BH40S  [ML40-MALE(GBH-254-SMT-40)]  40.64,5.71 180 top
GPIO-3  BH14S  [ML14_S]  82.3,5.71 180 top
HDMI  HDMI-SWM-19  [HDMI-SWM-19]  12.42,62.05 180 top
HPBP  TESTPADTESTPAD_40-ROUND  [TESTPAD_40-ROUND]  -12.06,-200.66 0 top  (outside the outline)
HVREG1  TESTPADTESTPAD_40-ROUND  [TESTPAD_40-ROUND]  -28.57,-200.66 0 top  (outside the outline)
HVREG2  TESTPADTESTPAD_40-ROUND  [TESTPAD_40-ROUND]  -20.32,-200.66 0 top  (outside the outline)
JTAG2PB_E  Open  [SJ_1_SMALLER]  -85.09,-237.49 0 top  (outside the outline)
JTAG-DEBUG  NA(HN1X10)  [HN1X10]  24.13,13.59 0 top
L1  FB0805/600R/200mA(201209-601)  [L0805_5MIL_DWS]  65.13,30.73 90 top
L2  FB0805/600R/200mA(201209-601)  [L0805_5MIL_DWS]  82.02,21.34 90 top
L3  FB0805/600R/200mA(201209-601)  [L0805_5MIL_DWS]  70.21,15.11 270 top
L4  CL470nH/0805/1.76R/250mA  [L0805_5MIL_DWS]  82.55,54.86 0 top
L5  CL470nH/0805/1.76R/250mA  [L0805_5MIL_DWS]  75.82,54.86 180 top
L6  FB0805/600R/2A  [L0805_5MIL_DWS]  9.75,41.38 90 top
L7  FB0805/600R/200mA(201209-601)  [L0805_5MIL_DWS]  9.75,34.14 270 top
L8  FB0805/600R/2A  [L0805_5MIL_DWS]  16.69,47.02 180 top
L9  FB0805/600R/2A  [L0805_5MIL_DWS]  16.69,51.51 180 top
L10  2.2uH/1.5A/DCR<0.1R/CD32  [CD32]  78.74,-46.99 90 top  (outside the outline)
L11  2.2uH/1.5A/DCR<0.1R/CD32  [CD32]  110.49,-46.99 90 top  (outside the outline)
L12  2.2uH/1.5A/DCR<0.1R/CD32  [CD32]  78.74,-53.34 90 top  (outside the outline)
L13  22uH/0.6R/0603  [L0805_5MIL_DWS]  77.24,40.31 270 top
L14  2.2uH/1.5A/DCR<0.1R/CD32  [CD32]  110.49,-53.34 90 top  (outside the outline)
L15  22uH/0.6R/0603  [L0805_5MIL_DWS]  81.48,43.97 0 top
L16  22uH/0.6R/0603  [L0805_5MIL_DWS]  79.27,40.31 270 top
LAN  RJLBC-060TC1  [RJLBC-060TC1]  95.61,19.68 90 top
LCD_CON  BH40S  [ML40-MALE(GBH-254-SMT-40)]  40.64,75.56 0 top
LED1  LED/GREEN/0603  [LED-0603]  40.64,-80.01 0 top  (outside the outline)
LINE_IN  PJ-W47S-05D2-LF_V2  [PJ-W47S-05D2-LF_5PIN_V2]  102.23,40.39 180 top
MIC/TV  NA(HN1X10)  [HN1X10]  24.13,16.38 0 top
POWER  T1107A(6x3.8x2.5mm)  [SW-TAKT_6X3.5_SMD]  -95.25,-231.14 0 top  (outside the outline)
PWR  YDJ-1136  [PWR_JACK_UNI_MILLING]  7.62,21.06 0 top
PWR_LED  LED/RED/0603  [LED-0603]  -93.98,-279.4 0 top  (outside the outline)
Q1  Q25.000MHz/HC-49SM/SMD/20ppm/20pF  [HC49/SMD2_THIN]  59.41,15.88 180 top
Q2  Q24.000MHz/HC-49SM/SMD/20ppm/20pF  [HC49/SMD2_THIN]  15.24,-36.83 0 top  (outside the outline)
R1  2k/1%  [R0603_5MIL_DWS]  213.61,-60.2 0 top  (outside the outline)
R2  1R  [R0603_5MIL_DWS]  -7.62,-20.32 0 top  (outside the outline)
R3  2k/1%  [R0603_5MIL_DWS]  213.61,-67.82 0 top  (outside the outline)
R4  NA  [R0603_5MIL_DWS]  218.69,-60.2 0 top  (outside the outline)
R5  2k/1%  [R0603_5MIL_DWS]  223.77,-60.2 0 top  (outside the outline)
R6  22R  [R0603_5MIL_DWS]  201.44,-103.16 90 top  (outside the outline)
R7  22R  [R0603_5MIL_DWS]  203,-103.16 90 top  (outside the outline)
R8  240R/1%  [R0603_5MIL_DWS]  197.74,-77.34 0 top  (outside the outline)
R9  2k/1%  [R0603_5MIL_DWS]  223.77,-67.82 0 top  (outside the outline)
R10  240R/1%  [R0603_5MIL_DWS]  235.2,-77.34 0 top  (outside the outline)
R11  240R/1%  [R0603_5MIL_DWS]  11.43,-58.42 0 top  (outside the outline)
R12  2.2k  [R0603_5MIL_DWS]  59.87,28.12 180 top
R13  2.2k  [R0603_5MIL_DWS]  59.87,26.59 0 top
R14  2k/1%  [R0603_5MIL_DWS]  74.27,30.73 270 top
R15  240R/1%  [R0603_5MIL_DWS]  81.38,34.8 180 top
R16  NA  [R0603_5MIL_DWS]  59.66,22.23 90 top
R17  240R/1%  [R0603_5MIL_DWS]  81.38,33.27 180 top
R18  NA  [R0603_5MIL_DWS]  30.48,-35.56 0 top  (outside the outline)
R19  NA(1M)  [R0603_5MIL_DWS]  82.55,65.28 180 top
R20  10k  [R0603_5MIL_DWS]  82.55,63.75 180 top
R21  47k  [R0603_5MIL_DWS]  36.83,-35.56 0 top  (outside the outline)
R22  NA  [R0603_5MIL_DWS]  32.38,-62.87 0 top  (outside the outline)
R23  10k  [R0603_5MIL_DWS]  82.55,66.8 180 top
R24  0R(Board_Mounted)  [0603_0R]  -7.62,-43.18 0 top  (outside the outline)
R25  NA(1M)  [R0603_5MIL_DWS]  75.82,63.75 180 top
R26  2.2k  [R0603_5MIL_DWS]  19.74,64.19 0 top
R27  10k  [R0603_5MIL_DWS]  75.82,51.56 0 top
R28  200k/1%  [R0603_5MIL_DWS]  17.78,-43.18 180 top  (outside the outline)
R29  2.2k  [R0603_5MIL_DWS]  19.74,65.71 0 top
R30  47k  [R0603_5MIL_DWS]  19.74,67.23 0 top
R31  10k  [R0603_5MIL_DWS]  75.82,53.09 0 top
R32  4.99k/1%  [R0603_5MIL_DWS]  24.08,39.32 90 top
R33  10k  [R0603_5MIL_DWS]  31.47,39.32 270 top
R34  13k/1%  [R0603_5MIL_DWS]  25.6,39.32 270 top
R35  10k  [R0603_5MIL_DWS]  22.56,39.32 270 top
R36  10k  [R0603_5MIL_DWS]  25.45,50.83 270 top
R37  13k/1%  [R0603_5MIL_DWS]  19.74,50.83 270 top
R38  NA  [R0603_5MIL_DWS]  63.45,85.75 270 top  (outside the outline)
R39  NA  [R0603_5MIL_DWS]  64.97,85.75 270 top  (outside the outline)
R40  1R  [R0603_5MIL_DWS]  5.08,-53.34 180 top  (outside the outline)
R41  47k  [R0603_5MIL_DWS]  -7.62,-68.58 180 top  (outside the outline)
R42  2.2k  [R0603_5MIL_DWS]  76.56,85.67 270 top  (outside the outline)
R43  2.2k  [R0603_5MIL_DWS]  78.08,85.67 270 top  (outside the outline)
R44  47k  [R0603_5MIL_DWS]  81.74,85.67 270 top  (outside the outline)
R45  47k  [R0603_5MIL_DWS]  10.16,-80.01 0 top  (outside the outline)
R46  10k  [R0603_5MIL_DWS]  -83.82,-224.79 0 top  (outside the outline)
R47  10k  [R0603_5MIL_DWS]  -83.82,-231.14 0 top  (outside the outline)
R48  1R  [R0603_5MIL_DWS]  85.09,-40.64 0 top  (outside the outline)
R49  2.2k  [R0603_5MIL_DWS]  34.29,-80.01 180 top  (outside the outline)
R50  47k  [R0603_5MIL_DWS]  129.54,-40.64 0 top  (outside the outline)
R51  2.2k  [R0603_5MIL_DWS]  148.59,-40.64 0 top  (outside the outline)
R52  2.2k  [R0603_5MIL_DWS]  154.94,-40.64 0 top  (outside the outline)
R53  47k  [R0603_5MIL_DWS]  85.09,-63.5 0 top  (outside the outline)
R54  1k  [R0603_5MIL_DWS]  -93.98,-243.84 0 top  (outside the outline)
R55  2.2k  [R0603_5MIL_DWS]  -93.98,-285.75 0 top  (outside the outline)
RM1  RA1206_(4X0603)_4B8_4.7k  [R_MATRIX_4]  81,25.4 0 top
RM2  RA1206_(4X0603)_4B8_4.7k  [R_MATRIX_4]  74.78,15.37 90 top
RM3  RA1206_(4X0603)_4B8_51R  [R_MATRIX_4]  71.35,30.73 270 top
RM4  RA1206_(4X0603)_4B8_100K  [R_MATRIX_4]  82.55,60.96 0 top
RM5  RA1206_(4X0603)_4B8_100K  [R_MATRIX_4]  75.82,60.96 180 top
RM6  RA1206_(4X0603)_4B8_51R  [R_MATRIX_4]  77.57,43.87 270 top
SD/MMC1  MICRO_SD+CP  [TFR-MEM-CON]  85.72,61.09 270 top
SD/MMC2  PSD006A-LT2-BA0  [SD_CARD]  87.25,55.37 270 bottom
T1  DTC114YKA  [SOT-23]  -93.98,-270.51 0 top  (outside the outline)
U1  A10S-TFBGA336  [TFBGA336]  192.53,-94.38 90 top  (outside the outline)
U2  H5TQ2G83CFR-H9C  [FBGA78]  187.2,-111.2 0 top  (outside the outline)
U3  H5TQ2G83CFR-H9C  [FBGA78]  197.7,-111.2 0 top  (outside the outline)
U4  RTL8201CP  [LQFP48]  72.11,23.24 0 top
U5  AT24C16BN-SH  [SO-08MN]  55.37,23.75 0 top
U6  RCLAMP0524P  [SLP2510P8]  15.01,59 90 top
U7  RCLAMP0524P  [SLP2510P8]  15.01,62.05 90 top
U8  RCLAMP0524P  [SLP2510P8]  15.01,65.1 90 top
U9  SY6280  [SOT23-5]  28.57,39.32 270 top
U10  SY6280  [SOT23-5]  22.71,50.83 270 top
U11  AXP152  [QFN40_5X5]  148.59,-49.53 0 top  (outside the outline)
U12  FIDUCIAL1X2  [FIDUCIAL-1X2]  -86.61,73.91 180 top  (outside the outline)
U13  FIDUCIAL1X2  [FIDUCIAL-1X2]  -82.55,73.91 180 top  (outside the outline)
U14  FIDUCIAL1X2  [FIDUCIAL-1X2]  -84.58,73.91 180 top  (outside the outline)
U15  FIDUCIAL1X2  [FIDUCIAL-1X2]  -28.57,-204.47 0 top  (outside the outline)
U16  FIDUCIAL1X2  [FIDUCIAL-1X2]  -20.32,-204.47 0 top  (outside the outline)
U17  FIDUCIAL1X2  [FIDUCIAL-1X2]  -12.06,-204.47 0 top  (outside the outline)
U$5  [LOGO-OPENHARDWARE_8X8]  -59.69,84.33 0 top  (outside the outline)
U$6  [OLIMEX1_V]  -84.84,68.07 0 bottom  (outside the outline)
U$8  [OLIMEX1_V]  -55.88,89.28 0 top  (outside the outline)
U$9  [PB]  -49.78,83.57 0 top  (outside the outline)
U$10  [ESD_SYMBOL]  -74.3,79.76 0 top  (outside the outline)
U$11  [RECYCLE_BIN1/8]  -45.85,80.26 0 top  (outside the outline)
U$12  [ROHS]  -51.69,89.41 0 top  (outside the outline)
UART1  NA(HN1X4)  [HN1X4]  16.51,19.18 0 top
UBOOT/REC  HN1x3(UBOOT:Close;REC:Open)  [JP2]  -78.74,-214.63 0 top  (outside the outline)
UEXT  BH10S  [ML10_S]  80.01,75.56 0 top
USB_HOST  USB_A_VERTICAL  [USB_A_VERTICAL_PTH]  -5.71,52.07 270 top
USB_OTG  USB-OTG  [USB_MINI_9PIN]  4.45,38.1 0 top

## Library data of the parts
1.2V_CPU 1.2V_INT 1.5V 3.0VA 3.3V AUDIO_OUT BOOT/REC D1 FUSE1 GND HPBP HVREG1 HVREG2 LINE_IN POWER PWR U5 = gogo
1.2V_CPU_E 1.2V_INT_E 1.5V_E 3.0VA_E 3.3V_E 5V/LDO0 JTAG2PB_E UBOOT/REC = jumper
C1-C126 L1-L9 L13 L15 L16 R1-R23 R25-R55 = rcl
D2 L10-L12 L14 R24 RM1-RM6 T1 = OLIMEX_DISCRET
FET1 JTAG-DEBUG MIC/TV UART1 = Penko
GPIO-1-GPIO-3 LCD_CON UEXT = con-harting-ml
HDMI LAN SD/MMC1 SD/MMC2 USB_HOST USB_OTG = OLIMEX_CONNECTORS
LED1 PWR_LED = DOUBLE-SIDE
Q1 Q2 = crystal
U1-U4 U6-U11 = OLIMEX_IC
U12-U17 = SparkFunEagle-6-6-07
U$5 U$6 U$8-U$12 = olimex_logo1

## Nets
+5V: 5V/LDO0.3 C88.1 C95.1 D2.C FET1.2 FUSE1.1 GPIO-1.1 GPIO-2.1 LCD_CON.1 PWR.+ R26.1 R29.1 R48.2 U9.5 U10.5 U11.29 U11.30
+5V_OTG_PWR: C87.1 FET1.3 L6.1 R53.2 USB_OTG.VBUS
A0: U1.V7 U2.K3 U3.K3
A1: U1.R4 U2.L7 U3.L7
A2: U1.U8 U2.L3 U3.L3
A3: U1.U7 U2.K2 U3.K2
A4: U1.P3 U2.L8 U3.L8
A5: U1.V8 U2.L2 U3.L2
A6: U1.R3 U2.M8 U3.M8
A7: U1.V10 U2.M2 U3.M2
A8: U1.T3 U2.N8 U3.N8
A9: U1.V9 U2.M3 U3.M3
A10: U1.M3 U2.H7 U3.H7
A11: U1.T4 U2.M7 U3.M7
A12: U1.P4 U2.K7 U3.K7
A13: U1.U9 U2.N3 U3.N3
A14: U1.U3 U2.N7 U3.N7
AVDD33: C47.2 C48.2 L1.1 U4.36
BA0: U1.U6 U2.J2 U3.J2
BA1: U1.N3 U2.K8 U3.K8
BA2: U1.V6 U2.J3 U3.J3
CASN: U1.V4 U2.G3 U3.G3
CKE: U1.L3 U2.G9 U3.G9
CLK: R6.1 U2.F7 U3.F7
CLKN: R7.1 U2.G7 U3.G7
D0: U1.K1 U2.B3
D1: U1.U2 U2.C7
D2: U1.J2 U2.C2
D3: U1.V1 U2.C8
D4: U1.J3 U2.E3
D5: U1.W1 U2.E8
D6: U1.J1 U2.D2
D7: U1.V2 U2.E7
D8: U1.T1 U3.B3
D9: U1.M1 U3.C7
D10: U1.U1 U3.C2
D11: U1.K2 U3.C8
D12: U1.R2 U3.E3
D13: U1.L1 U3.E8
D14: U1.T2 U3.D2
D15: U1.L2 U3.E7
DDR3_CK: R6.2 U1.W2
DDR3_CK_N: R7.2 U1.Y1
DDR3_CS0: U1.V5 U2.H2 U3.H2
DDR3_ODT0: U1.V11 U2.G1 U3.G1
DDR3_RST: U1.U10 U2.N2 U3.N2
DQM0: U1.P1 U2.B7
DQM1: U1.M2 U3.B7
DQS0: U1.N1 U2.C3
DQS0_N: U1.N2 U2.D3
DQS1: U1.P2 U3.C3
DQS1_N: U1.R1 U3.D3
DRAM-REF: C22.2 C23.2 C30.2 C31.2 R4.1 R5.1 R9.2 U2.E1 U2.J8 U3.E1 U3.J8
DVDD33 [PWR]: C58.2 C59.2 C60.2 L2.1 U4.14 U4.48
DZQ: R11.2 U1.K3
ECOL: U1.D14 U4.1
ECRS: U1.C13 U4.23
EMDC: U1.C12 U4.25
EMDIO: RM1.1.2 U1.D13 U4.26
EPHY-RST#: R16.1 U1.C14
ERXCK: U1.D10 U4.16
ERXD0: U1.C7 U4.21
ERXD1: U1.D7 U4.20
ERXD2: U1.C6 U4.19
ERXD3: U1.D6 U4.18
ERXDV: U1.D11 U4.22
ERXERR: U1.C10 U4.24
ETXCK: U1.D12 U4.7
ETXD0: U1.C9 U4.6
ETXD1: U1.D9 U4.5
ETXD2: U1.C8 U4.4
ETXD3: U1.D8 U4.3
ETXEN: U1.C11 U4.2
FMINL: MIC/TV.3 U1.W16
FMINR: MIC/TV.4 U1.V16
GND [PWR]: BOOT/REC.P$1 C1.1 C2.1 C3.1 C4.1 C5.1 C6.1 C7.1 C9.1 C10.1 C11.1 C12.1 C13.1 C14.1 C15.1 C16.1 C17.1 C18.1 C19.1 C20.1 C21.1 C23.1 C24.1 C25.1 C26.1 C27.1 C28.1 C29.1 C30.1 C31.1 C32.1 C33.1 C34.1 C35.1 C36.1 C37.1 C38.1 C39.1 C40.1 C41.1 C42.1 C43.1 C44.1 C45.1 C46.1 C47.1 C48.1 C49.1 C50.1 C51.1 C52.1 C53.1 C54.1 C55.1 C56.1 C57.1 C58.1 C59.1 C60.1 C61.1 C62.1 C63.2 C64.2 C65.2 C66.1 C67.1 C68.1 C69.1 C70.1 C71.1 C72.1 C73.1 C74.1 C75.1 C76.1 C78.1 C79.1 C80.1 C81.1 C82.1 C83.1 C84.1 C85.2 C86.- C87.2 C88.2 C89.1 C90.1 C91.1 C92.1 C93.1 C94.- C95.2 C96.2 C97.2 C98.1 C99.2 C100.2 C101.2 C102.2 C103.2 C104.2 C105.2 C106.2 C107.2 C108.2 C109.2 C110.2 C111.2 C112.2 C113.2 C114.1 C115.1 C116.2 C117.2 C118.2 C119.1 C120.2 C121.2 C124.2 C125.2 C126.2 D2.A GND.1 GPIO-1.2 GPIO-1.4 GPIO-2.2 GPIO-2.4 GPIO-3.2 GPIO-3.14 HDMI.2 HDMI.5 HDMI.8 HDMI.11 HDMI.17 HDMI.SH1 HDMI.SH2 HDMI.SH3 HDMI.SH4 JTAG2PB_E.1 JTAG-DEBUG.9 JTAG-DEBUG.10 L7.1 L9.1 LAN.GND1 LAN.GND2 LCD_CON.2 LCD_CON.4 LED1.C LINE_IN.5 MIC/TV.10 POWER.P$2 PWR.- R3.1 R8.1 R9.1 R10.1 R11.1 R14.1 R17.2 R19.2 R22.2 R24.1 R25.2 R28.2 R30.2 R33.1 R34.1 R35.1 R36.1 R37.1 RM1.3.2 RM2.2.1 RM2.3.1 RM2.4.1 RM4.4.1 SD/MMC1.6 SD/MMC2.3 SD/MMC2.6 SD/MMC2.SH1 SD/MMC2.SH2 SD/MMC2.WP T1.2 U1.D4 U1.G5 U1.H8 U1.H9 U1.H10 U1.H11 U1.H12 U1.H13 U1.J8 U1.J9 U1.J10 U1.J11 U1.J12 U1.J13 U1.K4 U1.K5 U1.K8 U1.K9 U1.K10 U1.K11 U1.K12 U1.K13 U1.L5 U1.L8 U1.L9 U1.L10 U1.L11 U1.L12 U1.L13 U1.M8 U1.M9 U1.M10 U1.M11 U1.M12 U1.M13 U1.N8 U1.N9 U1.N10 U1.N11 U1.N12 U1.N13 U1.N16 U1.P5 U1.R5 U1.T7 U1.T8 U1.T12 U1.U12 U1.U15 U1.U16 U1.V19 U2.A1 U2.A8 U2.B1 U2.B2 U2.B8 U2.C9 U2.D1 U2.D8 U2.D9 U2.F2 U2.F8 U2.J1 U2.J9 U2.L1 U2.L9 U2.N1 U2.N9 U3.A1 U3.A8 U3.B1 U3.B2 U3.B8 U3.C9 U3.D1 U3.D8 U3.D9 U3.F2 U3.F8 U3.J1 U3.J9 U3.L1 U3.L9 U3.N1 U3.N9 U4.11 U4.17 U4.29 U4.35 U4.40 U4.43 U4.45 U5.1 U5.2 U5.3 U5.4 U5.7 U6.3 U6.8 U7.3 U7.8 U8.3 U8.8 U9.2 U10.2 U11.3 U11.6 U11.14 U11.26 U11.36 U11.N1 U11.N2 U11.N3 U11.N4 U11.N5 U11.N6 U11.N7 U11.N8 U11.N9 U11.N10 U11.N11 U11.N12 U11.N13 U11.N14 U11.N15 U11.N16 U11.N17 U11.VSS UART1.4 UEXT.2 USB_HOST.4 USB_OTG.GND
HCEC: HDMI.13 U1.R17 U8.1 U8.10
HDMI_5V_SOURCE: FUSE1.2 HDMI.18
HHPD: HDMI.19 R30.1 U1.T17 U8.5 U8.6
HPCOM: L16.1 RM6.2.2 U1.V13 U1.W13
HPOUTL: L15.1 RM6.1.2 U1.Y13
HPOUTR: L13.1 RM6.3.2 U1.Y14
HSCL: HDMI.15 R26.2 U1.R18 U8.2 U8.9
HSDA: HDMI.16 R29.2 U1.T18 U8.4 U8.7
HTX0N: HDMI.9 U1.R19 U7.2 U7.9
HTX0P: HDMI.7 U1.R20 U7.1 U7.10
HTX1N: HDMI.6 U1.P19 U6.5 U6.6
HTX1P: HDMI.4 U1.P20 U6.4 U6.7
HTX2N: HDMI.3 U1.N19 U6.2 U6.9
HTX2P: HDMI.1 U1.N20 U6.1 U6.10
HTXCN: HDMI.12 U1.T19 U7.5 U7.6
HTXCP: HDMI.10 U1.T20 U7.4 U7.7
JTAG_SEL0_N: JTAG-DEBUG.6 R46.1 U1.M20
JTAG_SEL1_N: JTAG2PB_E.2 JTAG-DEBUG.7 R47.1 U1.M19
LCD_CLK: LCD_CON.31 U1.G17
LCD_D0: LCD_CON.21 U1.D15
LCD_D1: LCD_CON.22 U1.C15
LCD_D2: LCD_CON.23 U1.B15
LCD_D3: LCD_CON.24 U1.A15
LCD_D4: LCD_CON.25 U1.D16
LCD_D5: LCD_CON.26 U1.C16
LCD_D6: LCD_CON.27 U1.B16
LCD_D7: LCD_CON.28 U1.A16
LCD_D8: LCD_CON.13 U1.C17
LCD_D9: LCD_CON.14 U1.B17
LCD_D10: LCD_CON.15 U1.A17
LCD_D11: LCD_CON.16 U1.C18
LCD_D12: LCD_CON.17 U1.B18
LCD_D13: LCD_CON.18 U1.A18
LCD_D14: LCD_CON.19 U1.A19
LCD_D15: LCD_CON.20 U1.A20
LCD_D16: LCD_CON.5 U1.B19
LCD_D17: LCD_CON.6 U1.B20
LCD_D18: LCD_CON.7 U1.D17
LCD_D19: LCD_CON.8 U1.D18
LCD_D20: LCD_CON.9 U1.E17
LCD_D21: LCD_CON.10 U1.E18
LCD_D22: LCD_CON.11 U1.F17
LCD_D23: LCD_CON.12 U1.F18
LCD_DE: LCD_CON.32 U1.G18
LCD_HSYNC: LCD_CON.29 U1.H17
LCD_PWR: LCD_CON.35 U1.F2
LCD_VSYNC: LCD_CON.30 U1.H18
LDO0-OUT: 5V/LDO0.2 C102.1 C107.1 C109.1 C112.1 C118.1 C125.1 U11.4 U11.12 U11.19 U11.28 U11.38
LINEINL: C123.2 U1.U17
LINEINR: C122.2 U1.V18
LRADC0: GPIO-3.11 R18.1 U1.Y17
LRADC1: GPIO-3.12 U1.Y18
MIC1OUTN: MIC/TV.1 U1.W18
MIC1OUTP: MIC/TV.2 U1.W17
MICIN1: MIC/TV.6 U1.Y15
MICIN2: MIC/TV.8 U1.W15
MICM: C77.1 MIC/TV.7 R24.2
N$1: R22.1 U1.V17
N$2: HVREG1.1 U1.U18
N$3: R8.2 U2.H8
N$4: HVREG2.1 U1.U19
N$5: R10.2 U3.H8
N$6: R14.2 U4.28
N$7: HPBP.1 U1.U14
N$8: C121.1 U11.15 U11.23
N$9: C122.1 LINE_IN.3
N$10: 3.0VA_E.1 C108.1 U11.22
N$11: C66.2 U1.T16
N$12: RM1.3.1 U4.15
N$13: C123.1 LINE_IN.2
N$14: POWER.P$1 R54.2
N$15: C126.1 U11.9
N$16: PWR_LED.C T1.3
N$17: PWR_LED.A R55.2
N$18: C120.1 U11.20
N$19: FET1.1 PWR.-- R53.1
N$20: 5V/LDO0.1 U11.32
N$22: AUDIO_OUT.5 L16.2
N$23: C103.1 U11.8
N$25: AUDIO_OUT.2 L15.2
N$26: AUDIO_OUT.3 L13.2
N$27: C92.2 D1.C U1.P16
N$32: C69.2 R16.2 RM1.2.2 U4.42
N$33: C73.2 RM3.1.1 RM3.2.1
N$34: C115.2 RM6.1.1
N$35: C119.2 RM6.2.1
N$39: LAN.1 RM3.4.2 U4.34
N$40: LAN.2 RM3.3.2 U4.33
N$41: LAN.7 RM3.2.2 U4.31
N$44: C114.2 RM6.3.1
N$45: LAN.8 RM3.1.2 U4.30
N$47: C72.2 RM3.3.1 RM3.4.1
N$48: L10.1 U11.37
N$49: RM2.2.2 U4.10
N$51: RM2.3.2 U4.12
N$53: LAN.KG R15.1
N$54: LAN.AY RM2.4.2 U4.13
N$55: C63.1 L3.1 U4.8
N$56: C64.1 C65.1 C70.2 L3.2 LAN.3 U4.32
N$57: LAN.KY R17.1
N$58: R23.1 SD/MMC1.12
N$63 [PWR]: 3.3V_E.1 C100.1 C101.1 L10.2 U11.39
N$64: C99.1 R48.1
N$68: R15.2 RM2.1.2 U4.9
N$69: L11.1 U11.5
N$70 [PWR]: 1.2V_CPU_E.1 C105.1 C106.1 L11.2 U11.7
N$71: L12.1 U11.13
N$72 [PWR]: 1.5V_E.1 C110.1 C111.1 L12.2 U11.11
N$74: L14.1 U11.27
N$75 [PWR]: 1.2V_INT_E.1 C116.1 C117.1 L14.2 U11.25
N$88: BOOT/REC.P$2 R45.2 UBOOT/REC.2
N$99: R34.2 U9.3
N$100: C86.+ L6.2 R32.2 U9.1
N$101: R37.2 U10.3
N$110: L9.2 USB_HOST.P$3 USB_HOST.P$4
N$111: C96.1 L8.2 USB_HOST.1
N$122: C81.2 C82.2 U1.W14
N$133: C77.2 U1.V15
N$161: R31.1 SD/MMC2.CD
N$176: C78.2 C79.2 R28.1 U1.V14
N$192: C94.+ L8.1 U10.1
N$229: LCD_CON.33 R38.1
N$230: LCD_CON.34 R39.1
N$231: LED1.A R49.2
N$266: L7.2 USB_OTG.GND1 USB_OTG.GND2 USB_OTG.GND3 USB_OTG.GND4
NMI_N: GPIO-1.6 R50.1 U1.B9 U11.31
PIN0: GPIO-1.7 U11.40
PIN1: GPIO-1.9 U11.1
PIN2: GPIO-1.10 U11.24
PIN3: GPIO-1.8 U1.H20
PIN4/TWI0-SCK: GPIO-2.5 R51.1 U1.L20 U11.35
PIN5/TWI0-SDA: GPIO-2.7 R52.1 U1.L19 U11.34
PIN6/PWM0: GPIO-2.9 LCD_CON.36 U1.K20
PIN7: GPIO-2.11 R38.2 U1.A14
PIN8: GPIO-2.13 R39.2 U1.K19
PIN9: GPIO-2.15 U1.B6
PIN10/TWI1-SCK: GPIO-2.17 GPIO-3.5 R12.2 U1.J20 U5.6
PIN11/TWI1-SDA: GPIO-2.19 GPIO-3.6 R13.1 U1.J19 U5.5
PIN12/NWE: GPIO-2.21 U1.D1
PIN13/NALE: GPIO-2.23 U1.C3
PIN14/NCLE: GPIO-2.25 U1.C2
PIN15/NCE1: GPIO-2.27 U1.C1
PIN16/NCE0: GPIO-2.29 U1.B2
PIN17/NRE: GPIO-2.31 U1.B1
PIN18/NRB0: GPIO-2.33 U1.A1
PIN19/NRB1: GPIO-2.35 U1.A2
PIN20/NDQ0: GPIO-2.37 U1.B3
PIN21/NDQ1: GPIO-2.39 U1.A3
PIN22/NDQ2: GPIO-2.40 U1.C4
PIN23/NDQ3: GPIO-2.38 U1.B4
PIN24/NDQ4: GPIO-2.36 U1.A4
PIN25/NDQ5: GPIO-2.34 U1.D5
PIN26/NDQ6: GPIO-2.32 U1.C5
PIN27/NDQ7: GPIO-2.30 U1.B5
PIN28/NWP: GPIO-2.28 U1.A5
PIN29: GPIO-2.26 U1.F20
PIN30: GPIO-2.24 U1.F19
PIN31: GPIO-2.22 U1.E20
PIN32: GPIO-2.20 U1.E19
PIN33: GPIO-2.18 U1.D20
PIN34: GPIO-2.16 U1.D19
PIN35: GPIO-2.14 U1.C20
PIN36: GPIO-2.12 U1.C19
PIN37/LED1 [PWR]: GPIO-2.10 R49.1 U1.G19
PIN38: GPIO-2.8 U1.G20
PIN39 [PWR]: GPIO-2.6 U1.H19
PIN40/UART3-TX: GPIO-3.3 U1.G1
PIN41/UART3-RX: GPIO-3.4 U1.G2
PIN42: GPIO-3.7 U1.D2
PIN43: GPIO-3.8 U1.E1
PIN44: GPIO-3.9 U1.E2
PIN45: GPIO-3.10 U1.F1
PWRON: C124.1 R54.1 U11.2
RASN: U1.U4 U2.F3 U3.F3
RECOVERY: U1.B11 UBOOT/REC.3
RESET_N: C75.2 GPIO-1.5 JTAG-DEBUG.8 R21.1 T1.1 U1.A8 U11.33
RTC-VCC: C113.1 R50.2 U11.18
SD0-CLK: SD/MMC1.5 U1.K18
SD0-CMD: R20.1 SD/MMC1.3 U1.K17
SD0-D0: RM4.2.1 SD/MMC1.7 U1.L17
SD0-D1: RM4.3.1 SD/MMC1.8 U1.L18
SD0-D2: RM4.1.1 SD/MMC1.1 U1.J17
SD0-D3: R19.1 SD/MMC1.2 U1.J18
SD0-DET#: RM4.4.2 SD/MMC1.10 U1.A10
SD1-CLK: SD/MMC2.5 U1.B12
SD1-CMD: R27.1 SD/MMC2.2 U1.A11
SD1-D0: RM5.2.1 SD/MMC2.7 U1.A12
SD1-D1: RM5.3.1 SD/MMC2.8 U1.B13
SD1-D2: RM5.1.1 SD/MMC2.9 U1.A13
SD1-D3: R25.1 SD/MMC2.1 U1.B14
SD1-DET#: R31.2 RM5.4.1 U1.H3
SD_VCC: C74.2 C76.2 L4.2 SD/MMC1.4
SD_VCC1: C80.2 C83.2 L5.2 SD/MMC2.4
SPI2-CLK/JTAG_CKO: JTAG-DEBUG.3 U1.E4 UEXT.9
SPI2-CS0/JTAG_MS0: JTAG-DEBUG.2 R44.1 U1.E3 UEXT.10
SPI2-MISO/JTAG_DI0: JTAG-DEBUG.5 U1.F4 UEXT.7
SPI2-MOSI/JTAG_DO0: JTAG-DEBUG.4 U1.F3 UEXT.8
SVREF: C8.2 C9.2 C49.2 C50.2 R1.1 R3.2 R4.2 U1.L4 U1.U11
TPX1: C89.2 LCD_CON.37 U1.Y20
TPX2: C90.2 LCD_CON.38 U1.Y19
TPY1: C91.2 LCD_CON.39 U1.W20
TPY2: C93.2 LCD_CON.40 U1.W19
TVOUT: MIC/TV.9 U1.M18
TWI2-SCK: R42.1 U1.A7 UEXT.5
TWI2-SDA: R43.1 U1.B8 UEXT.6
UART0-RX: U1.G4 UART1.3
UART0-TX: U1.G3 UART1.2
UART2-RX: U1.B7 UEXT.4
UART2-TX: U1.A6 UEXT.3
UBOOT: U1.A9 UBOOT/REC.1
UDM0: U1.P18 USB_OTG.D-
UDM1: U1.N18 USB_HOST.2
UDP0: U1.P17 USB_OTG.D+
UDP1: U1.N17 USB_HOST.3
USB0-DRV: R33.2 U1.H1 U9.4
USB0-IDDET: R41.2 U1.H2 USB_OTG.ID
USB0-VBUSDET: C85.1 R32.1 R35.2 U1.B10
USB1-DRV [PWR]: R36.2 U1.D3 U10.4
V12_DLL: C10.2 C11.2 C12.2 R2.1 U1.J4 U1.J5
V33_HDMI: C97.1 C98.2 R40.2 U1.R16
V+: 1.5V.1 1.5V_E.2 C1.2 C2.2 C3.2 C4.2 C5.2 C6.2 C7.2 C8.1 C22.1 C24.2 C25.2 C26.2 C27.2 C28.2 C29.2 C32.2 C33.2 C34.2 C35.2 C36.2 C37.2 R1.2 R5.2 U1.M5 U1.N5 U1.T5 U1.T6 U1.T9 U1.T10 U1.T11 U2.A2 U2.A9 U2.B9 U2.C1 U2.D7 U2.E2 U2.E9 U2.G2 U2.G8 U2.K1 U2.K9 U2.M1 U2.M9 U3.A2 U3.A9 U3.B9 U3.C1 U3.D7 U3.E2 U3.E9 U3.G2 U3.G8 U3.K1 U3.K9 U3.M1 U3.M9
VCC [PWR]: 3.3V.1 3.3V_E.2 C51.2 C52.2 C53.2 C54.2 C55.2 C56.2 C57.2 C84.2 C104.1 D1.A GPIO-1.3 GPIO-2.3 GPIO-3.1 JTAG-DEBUG.1 L1.2 L2.2 L4.1 L5.1 LAN.AG LCD_CON.3 R12.1 R13.2 R20.2 R21.2 R23.2 R27.2 R40.1 R41.1 R42.2 R43.2 R44.2 R45.1 R46.2 R47.2 R51.2 R52.2 R55.1 RM1.1.1 RM1.2.1 RM2.1.1 RM4.1.2 RM4.2.2 RM4.3.2 RM5.1.2 RM5.2.2 RM5.3.2 RM5.4.2 U1.E5 U1.F5 U1.G16 U1.H16 U1.J16 U1.K16 U1.L16 U1.T14 U4.37 U4.38 U4.39 U4.41 U4.44 U5.8 U11.10 UART1.1 UEXT.1
VCC/2: 1.2V_CPU.1 1.2V_CPU_E.2 C38.2 C39.2 C40.2 C41.2 C42.2 C43.2 C44.2 C45.2 C46.2 U1.E6 U1.E7 U1.E8 U1.E9 U1.E10 U1.E11 U1.E12 U1.E13 U1.E14
VCCINT: 1.2V_INT.1 1.2V_INT_E.2 C13.2 C14.2 C15.2 C16.2 C17.2 C18.2 C19.2 C20.2 C21.2 R2.2 U1.E15 U1.E16 U1.F16 U1.H4 U1.H5 U1.M16 U1.M17 U1.T13 U1.U13
VMIC: MIC/TV.5 U1.Y16
VPP [PWR]: 3.0VA.1 3.0VA_E.2 C71.2 GPIO-3.13 R18.2 U1.T15
WEN: U1.V3 U2.H3 U3.H3
XTALI: C67.2 Q2.2 U1.U20
XTALI1: C61.2 Q1.2 U4.46
XTALO: C68.2 Q2.1 U1.V20
XTALO1: C62.2 Q1.1 U4.47